# Altium PCB PiMX8MP_r0.3.PcbDoc (part 1 of 10)
Units mm, origin at the board's own origin, x right, y up, seen from the top; angles counter-clockwise.
Board outline 55 x 40 mm, 10 copper layers (Top Layer, Layer 1, Layer 2, Layer 3, Layer 4, Layer 5, Layer 6, Layer 7, Layer 8, Bottom Layer), stack 1.472 mm thick; 545 components, 477 nets, 2606 pads, 2278 vias.
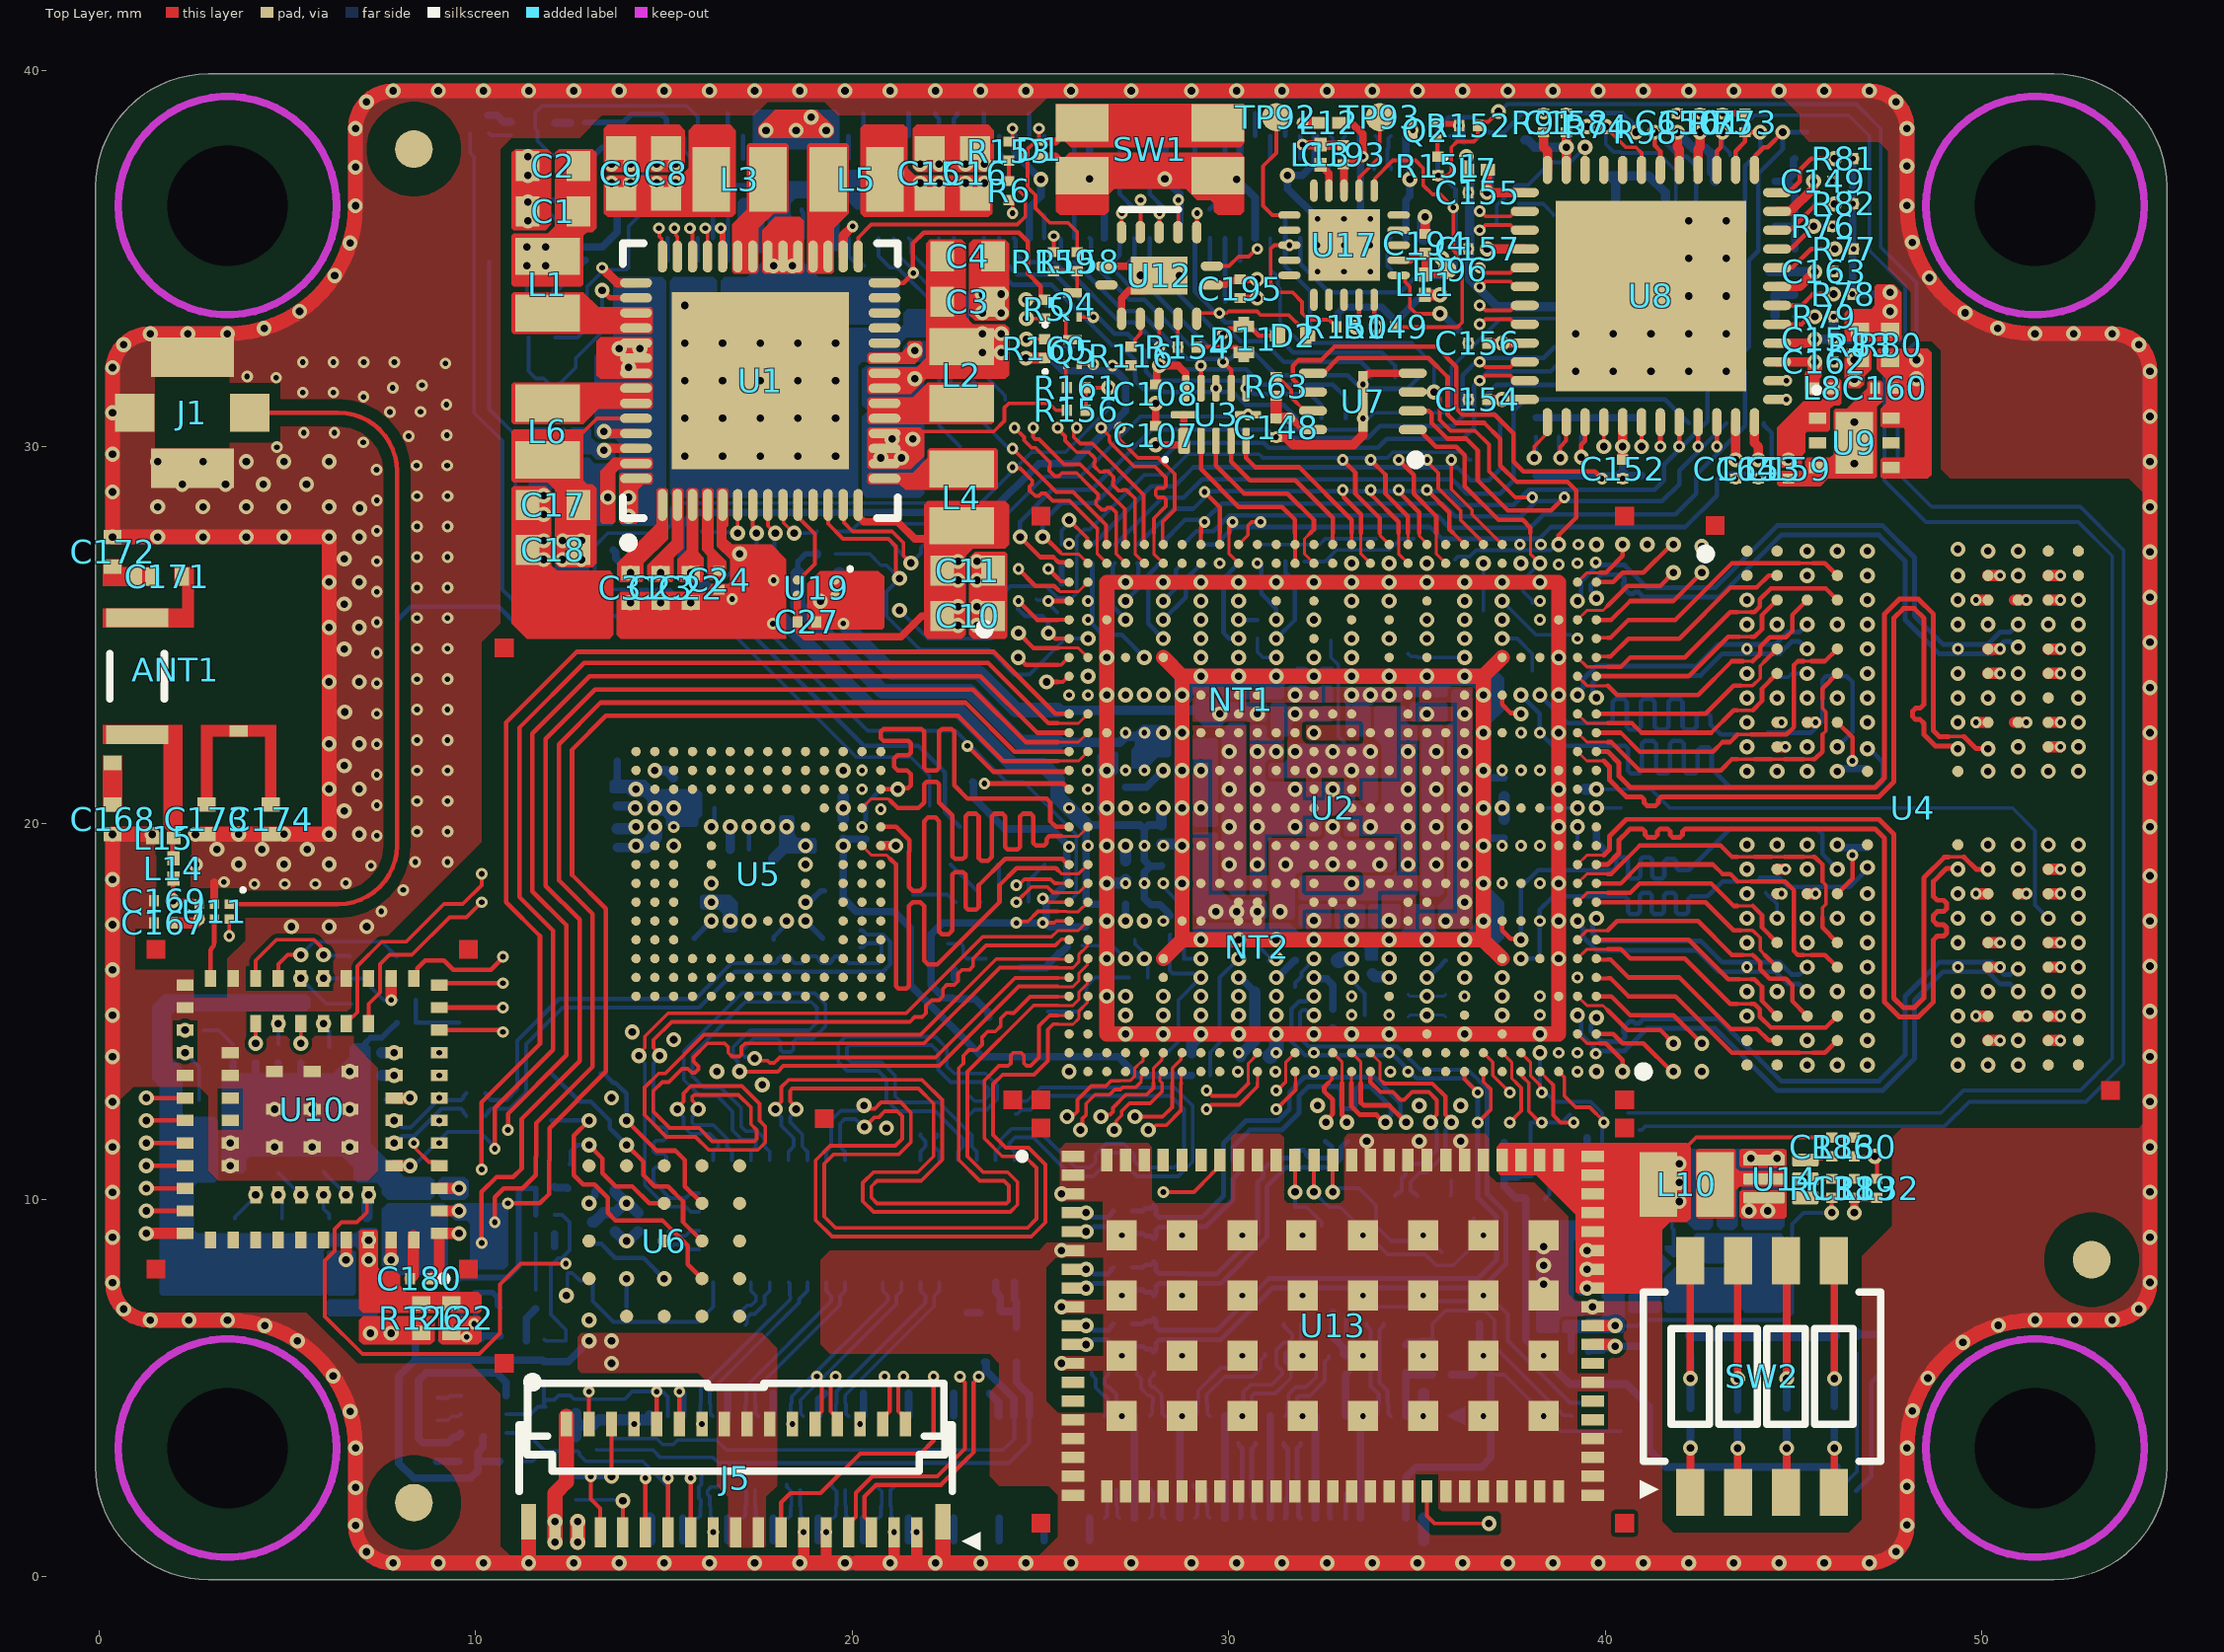
[diagram p0: Top Layer view]
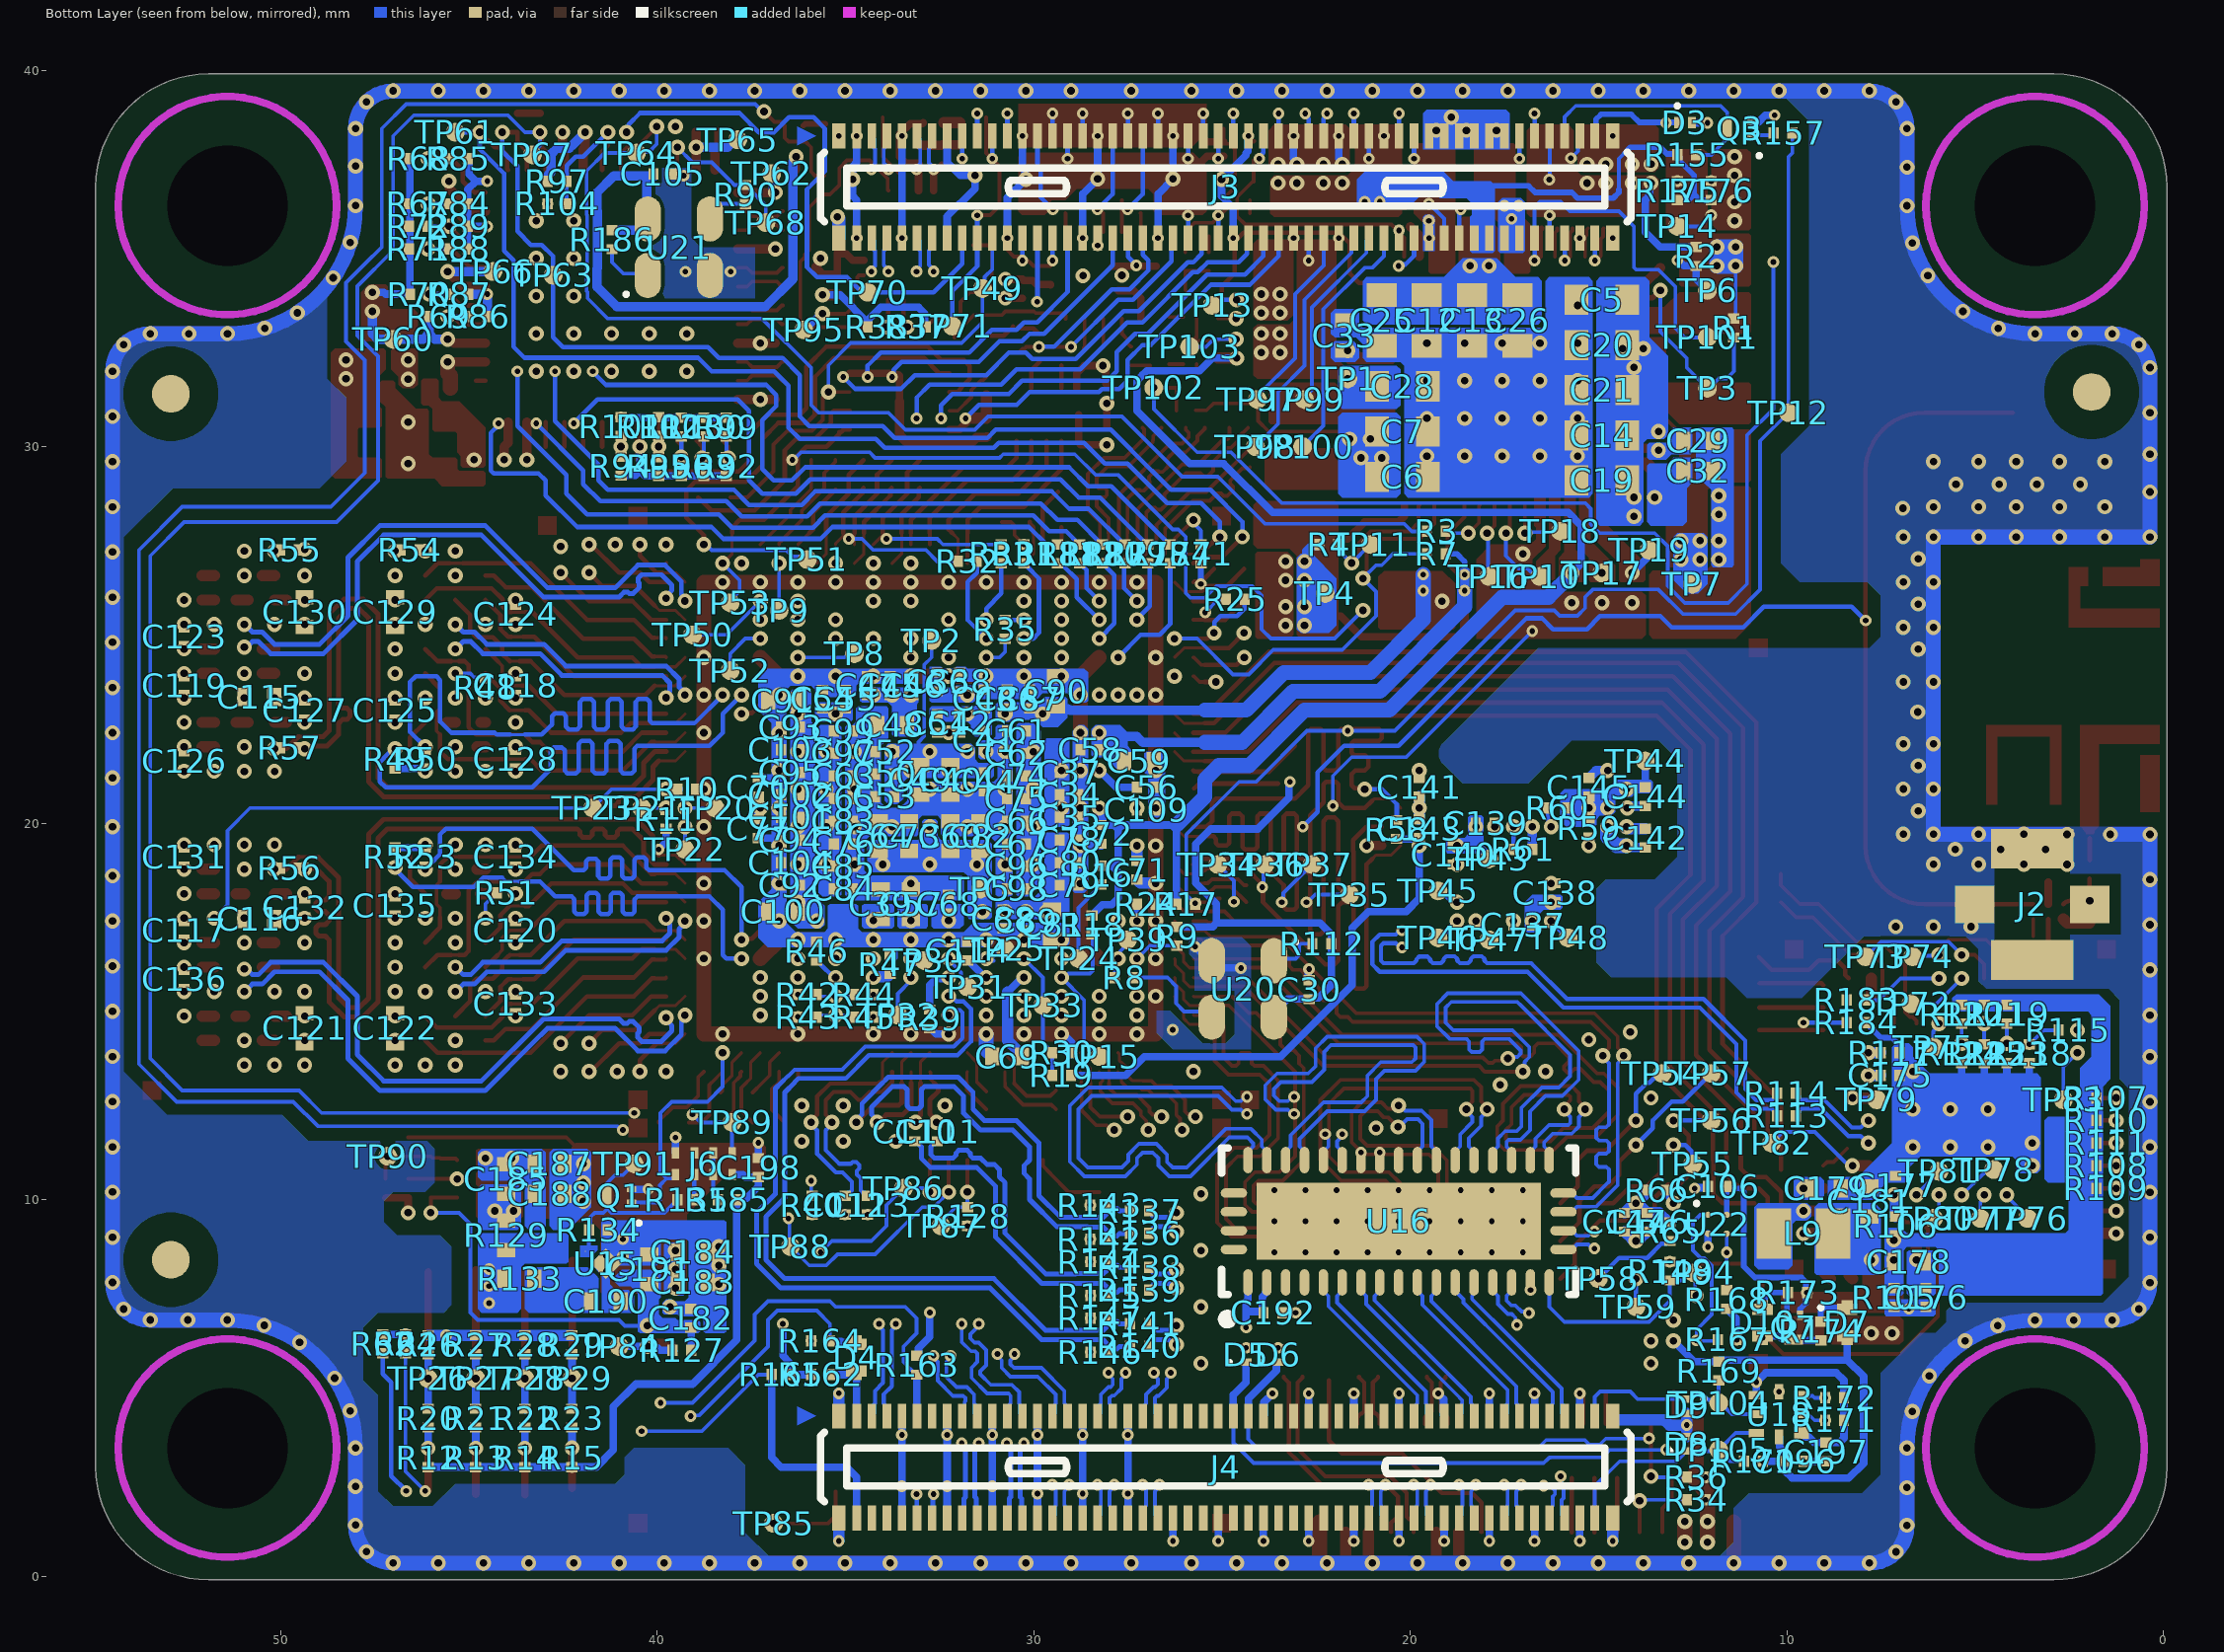
[diagram p1: Bottom Layer view, seen from below]
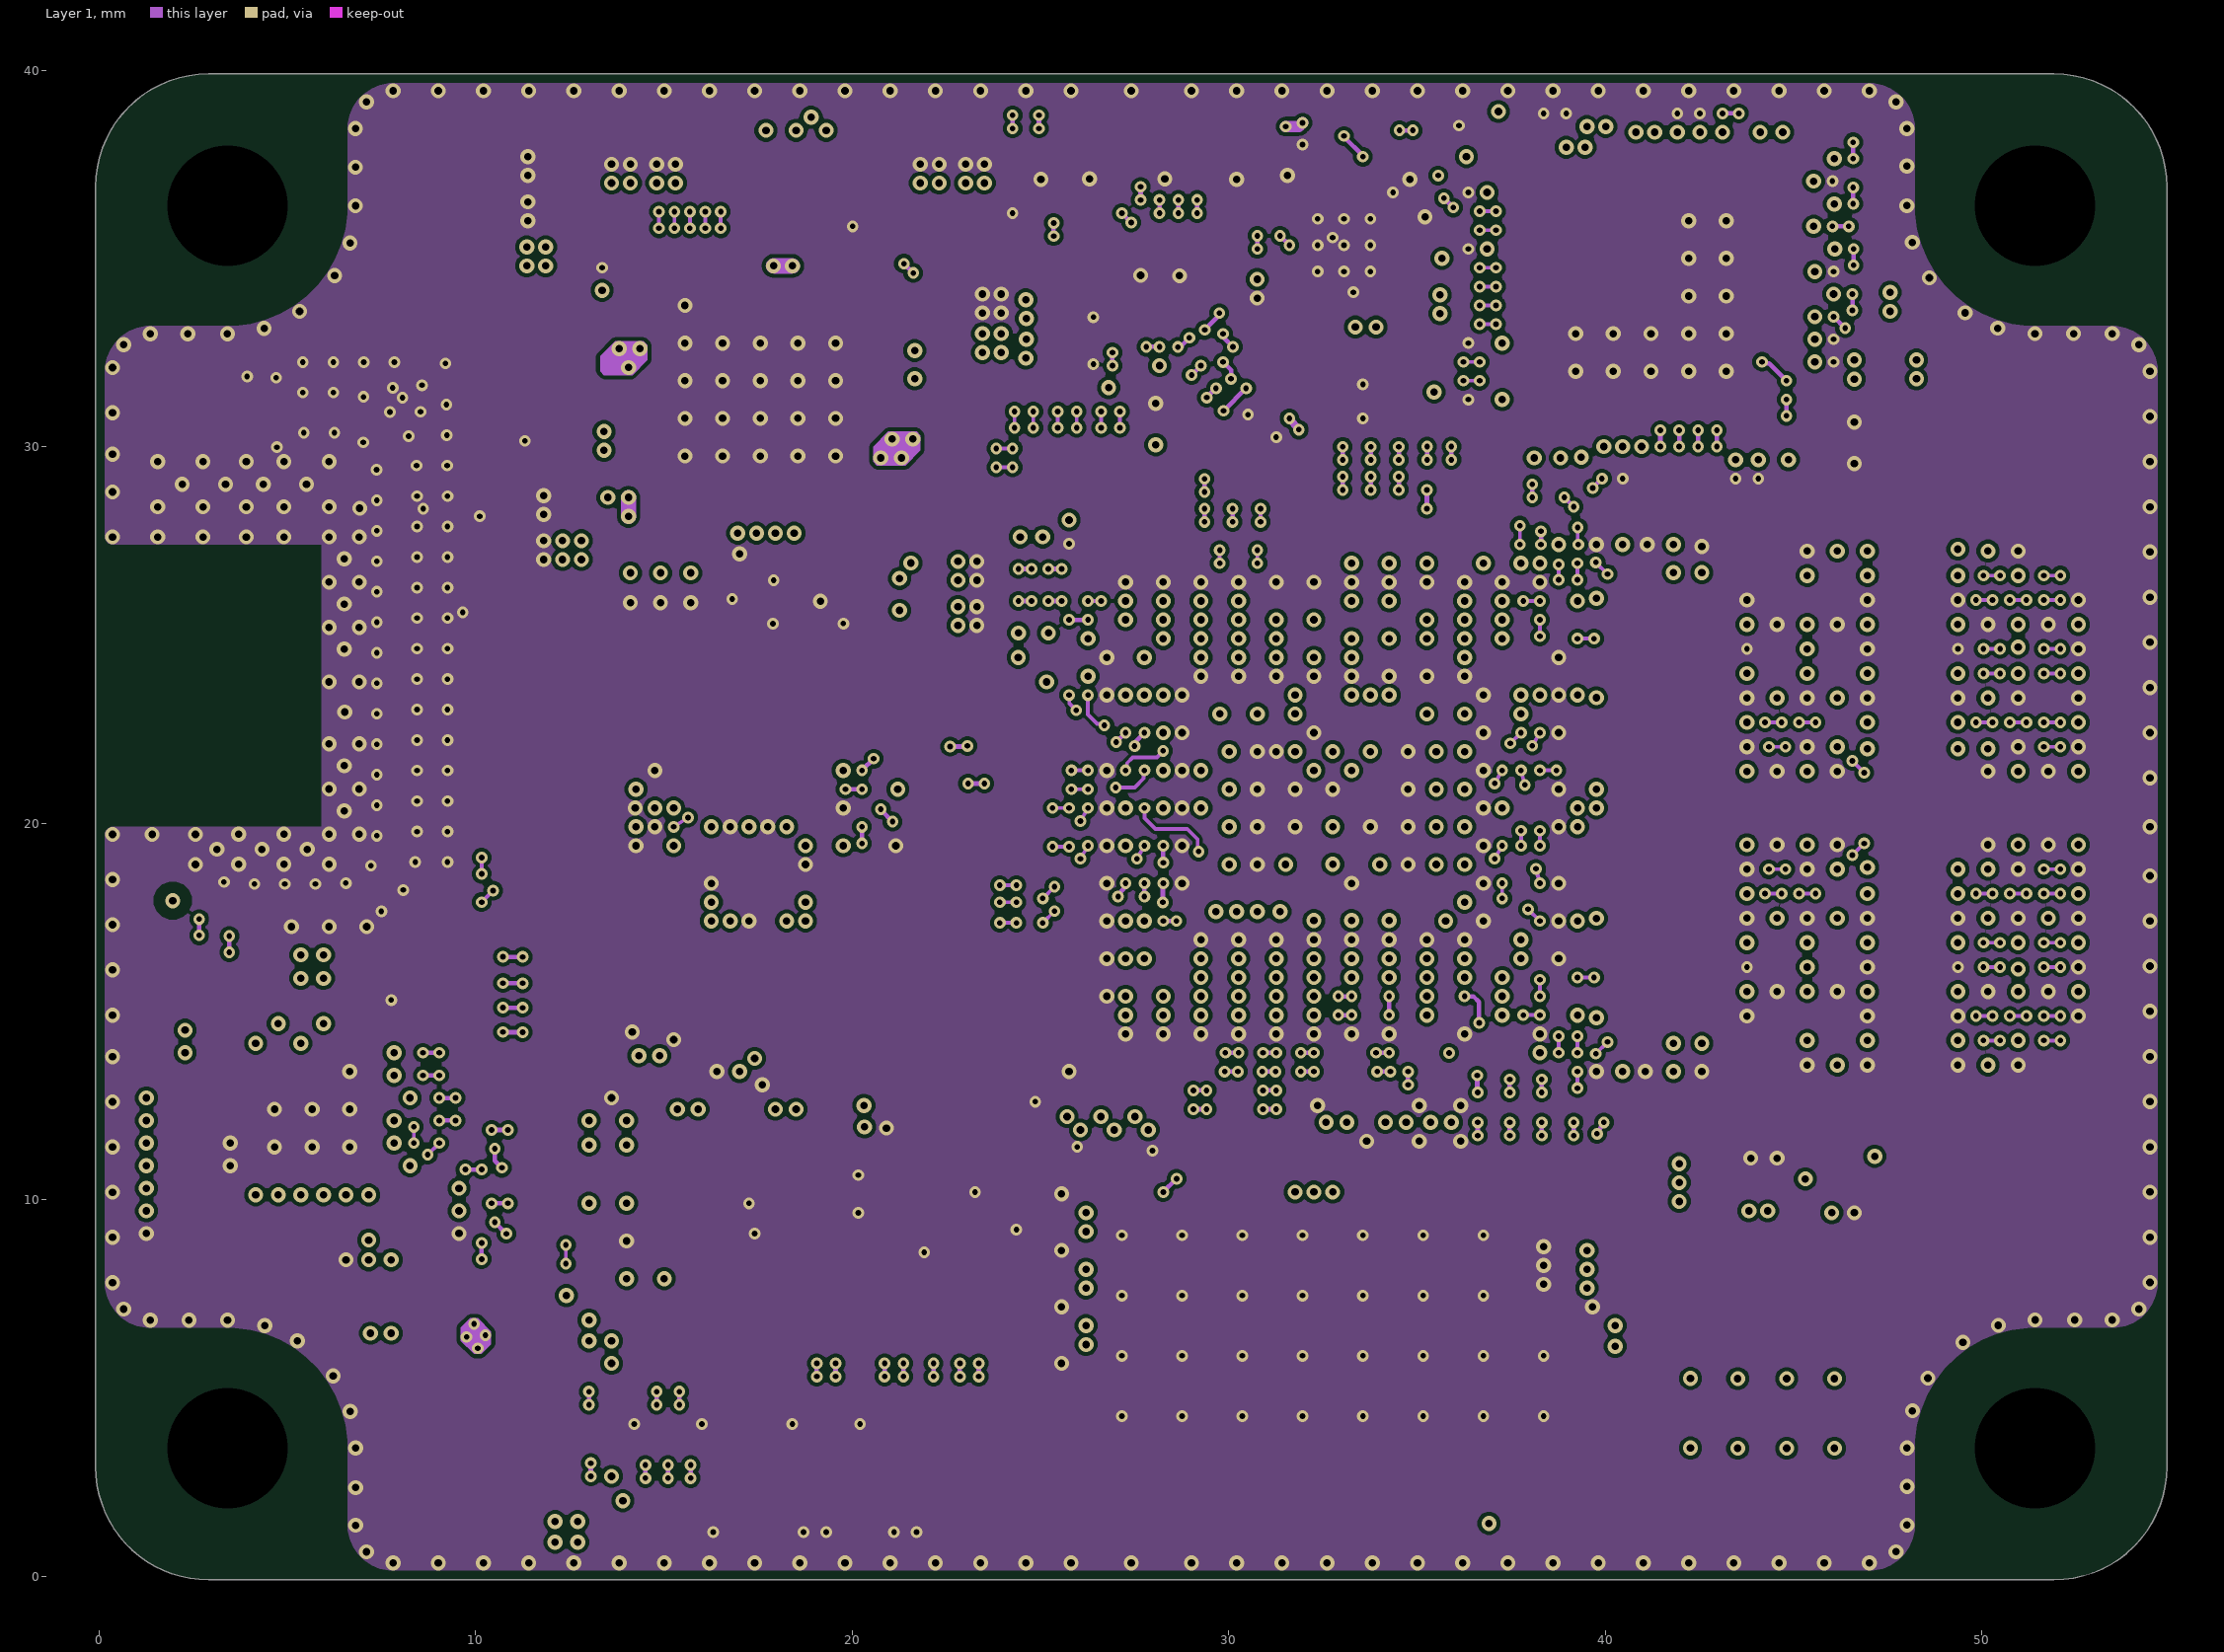
[diagram p2: Layer 1]
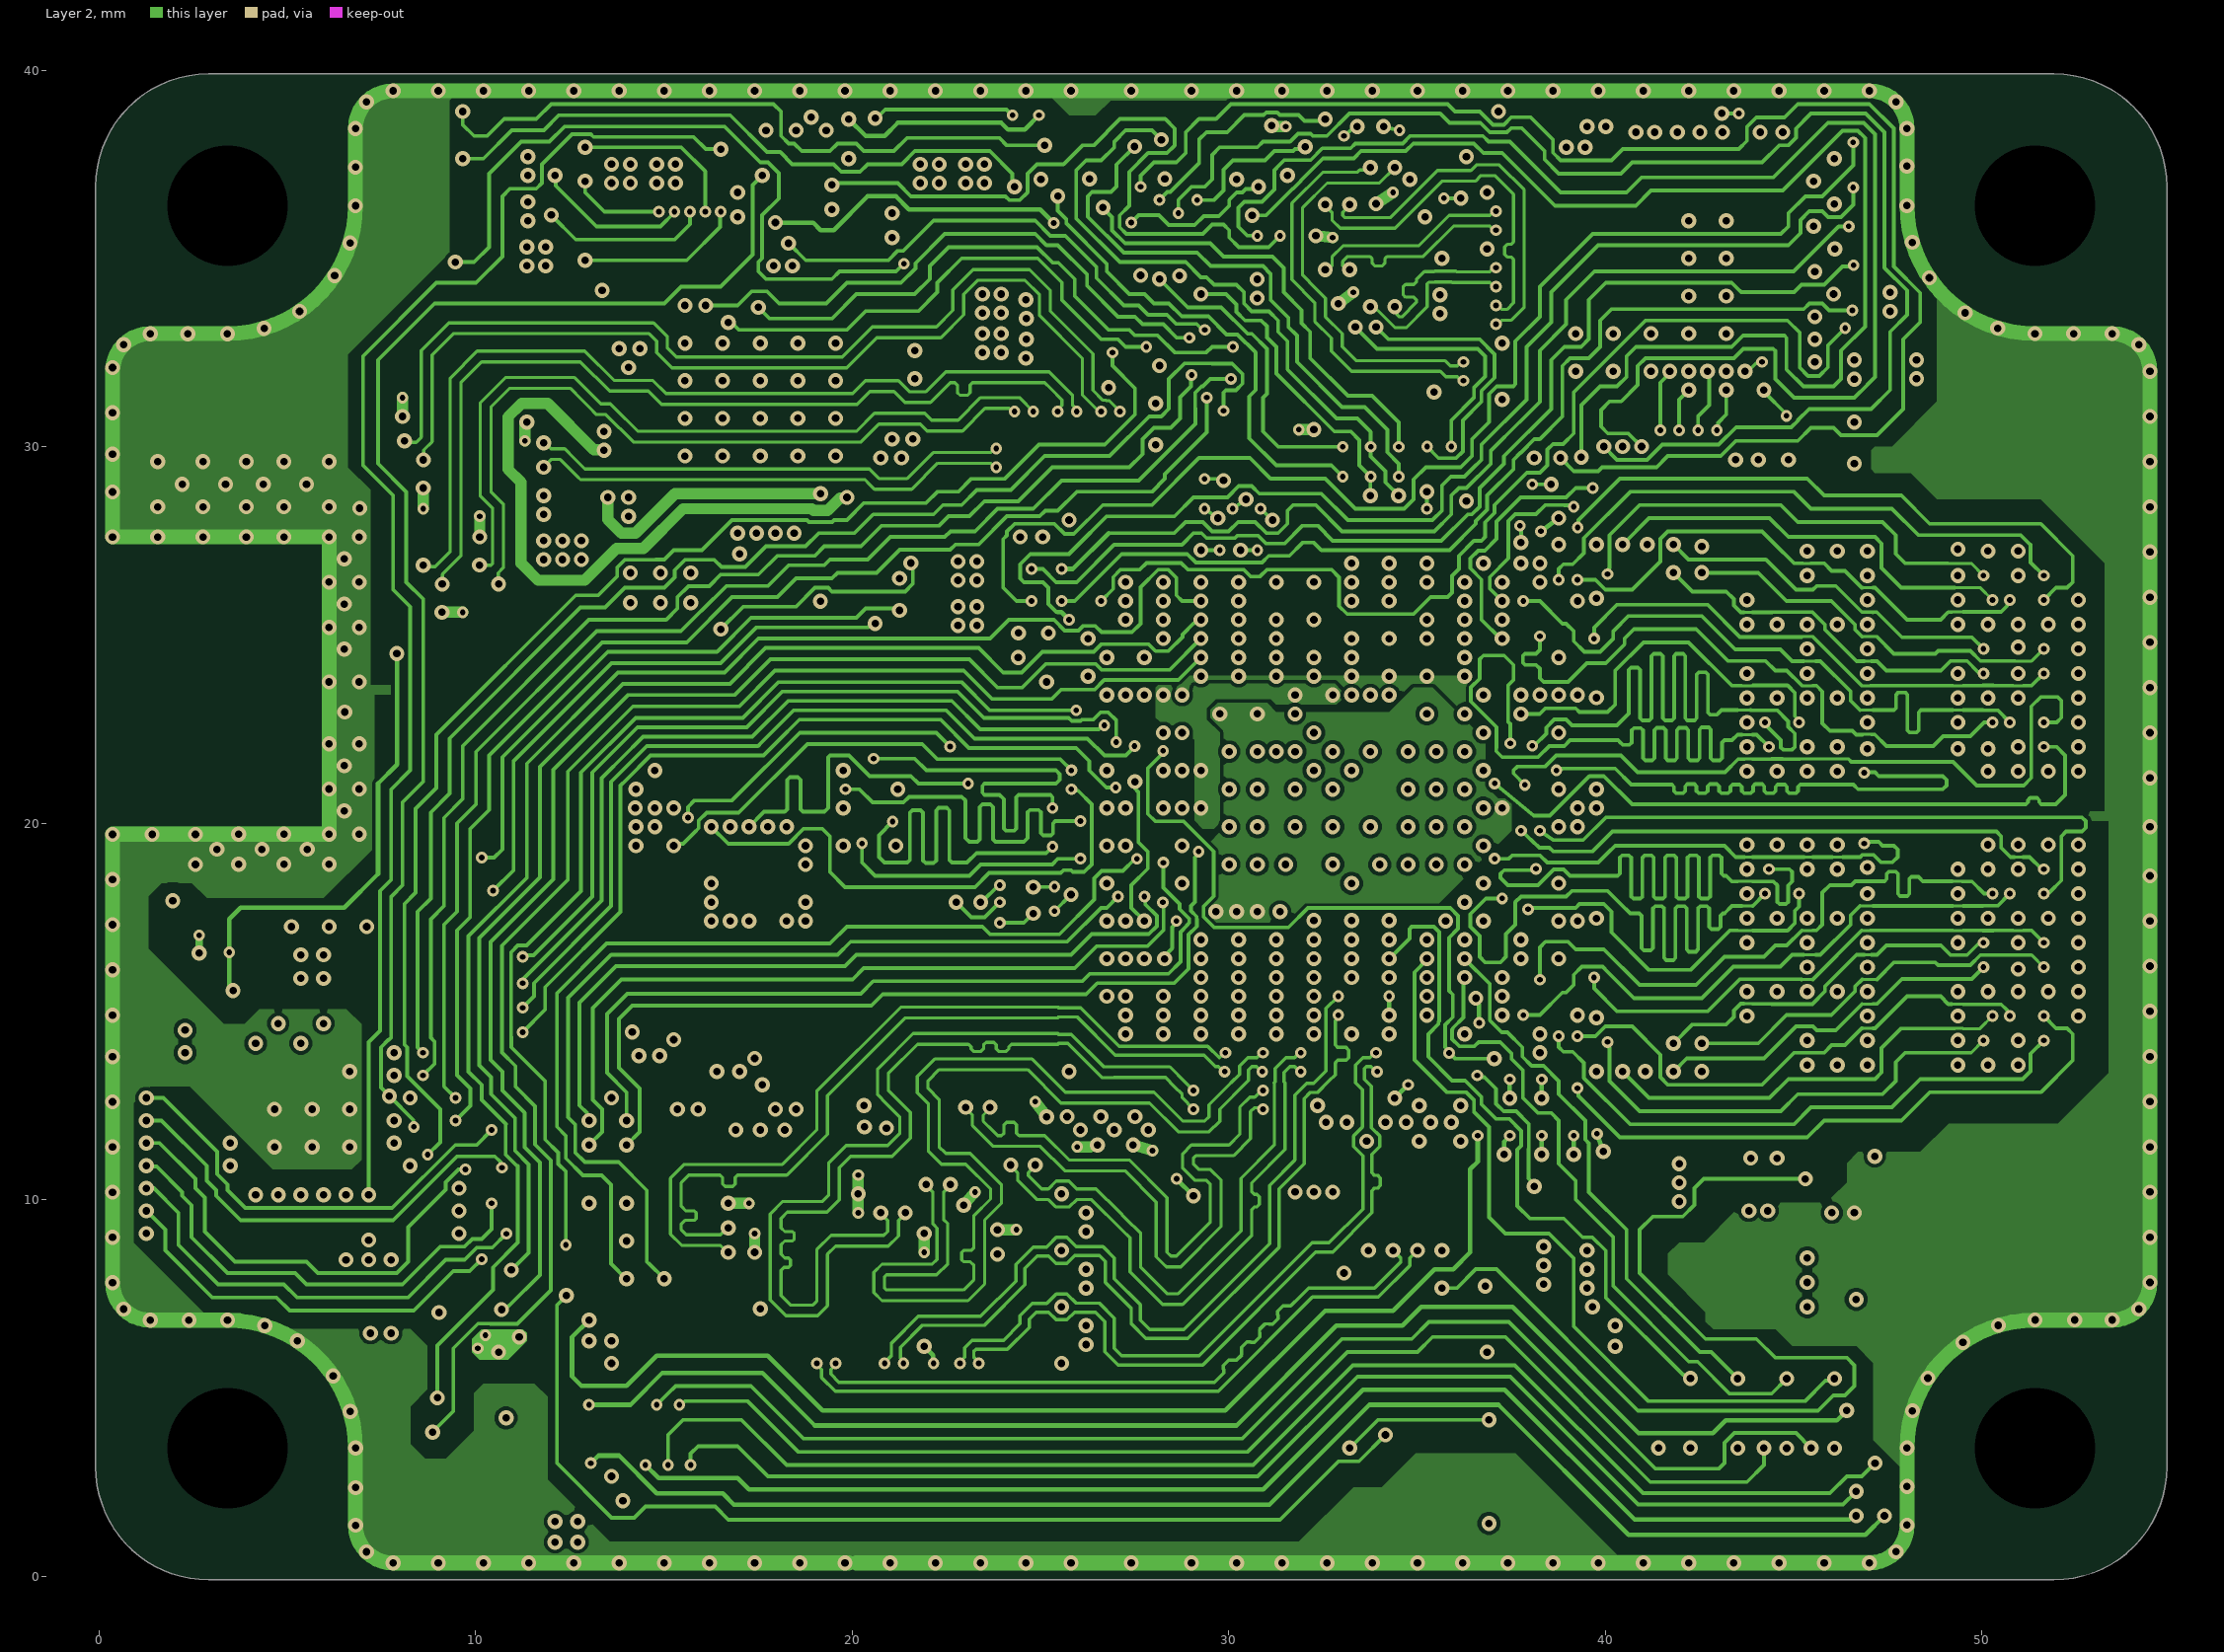
[diagram p3: Layer 2]
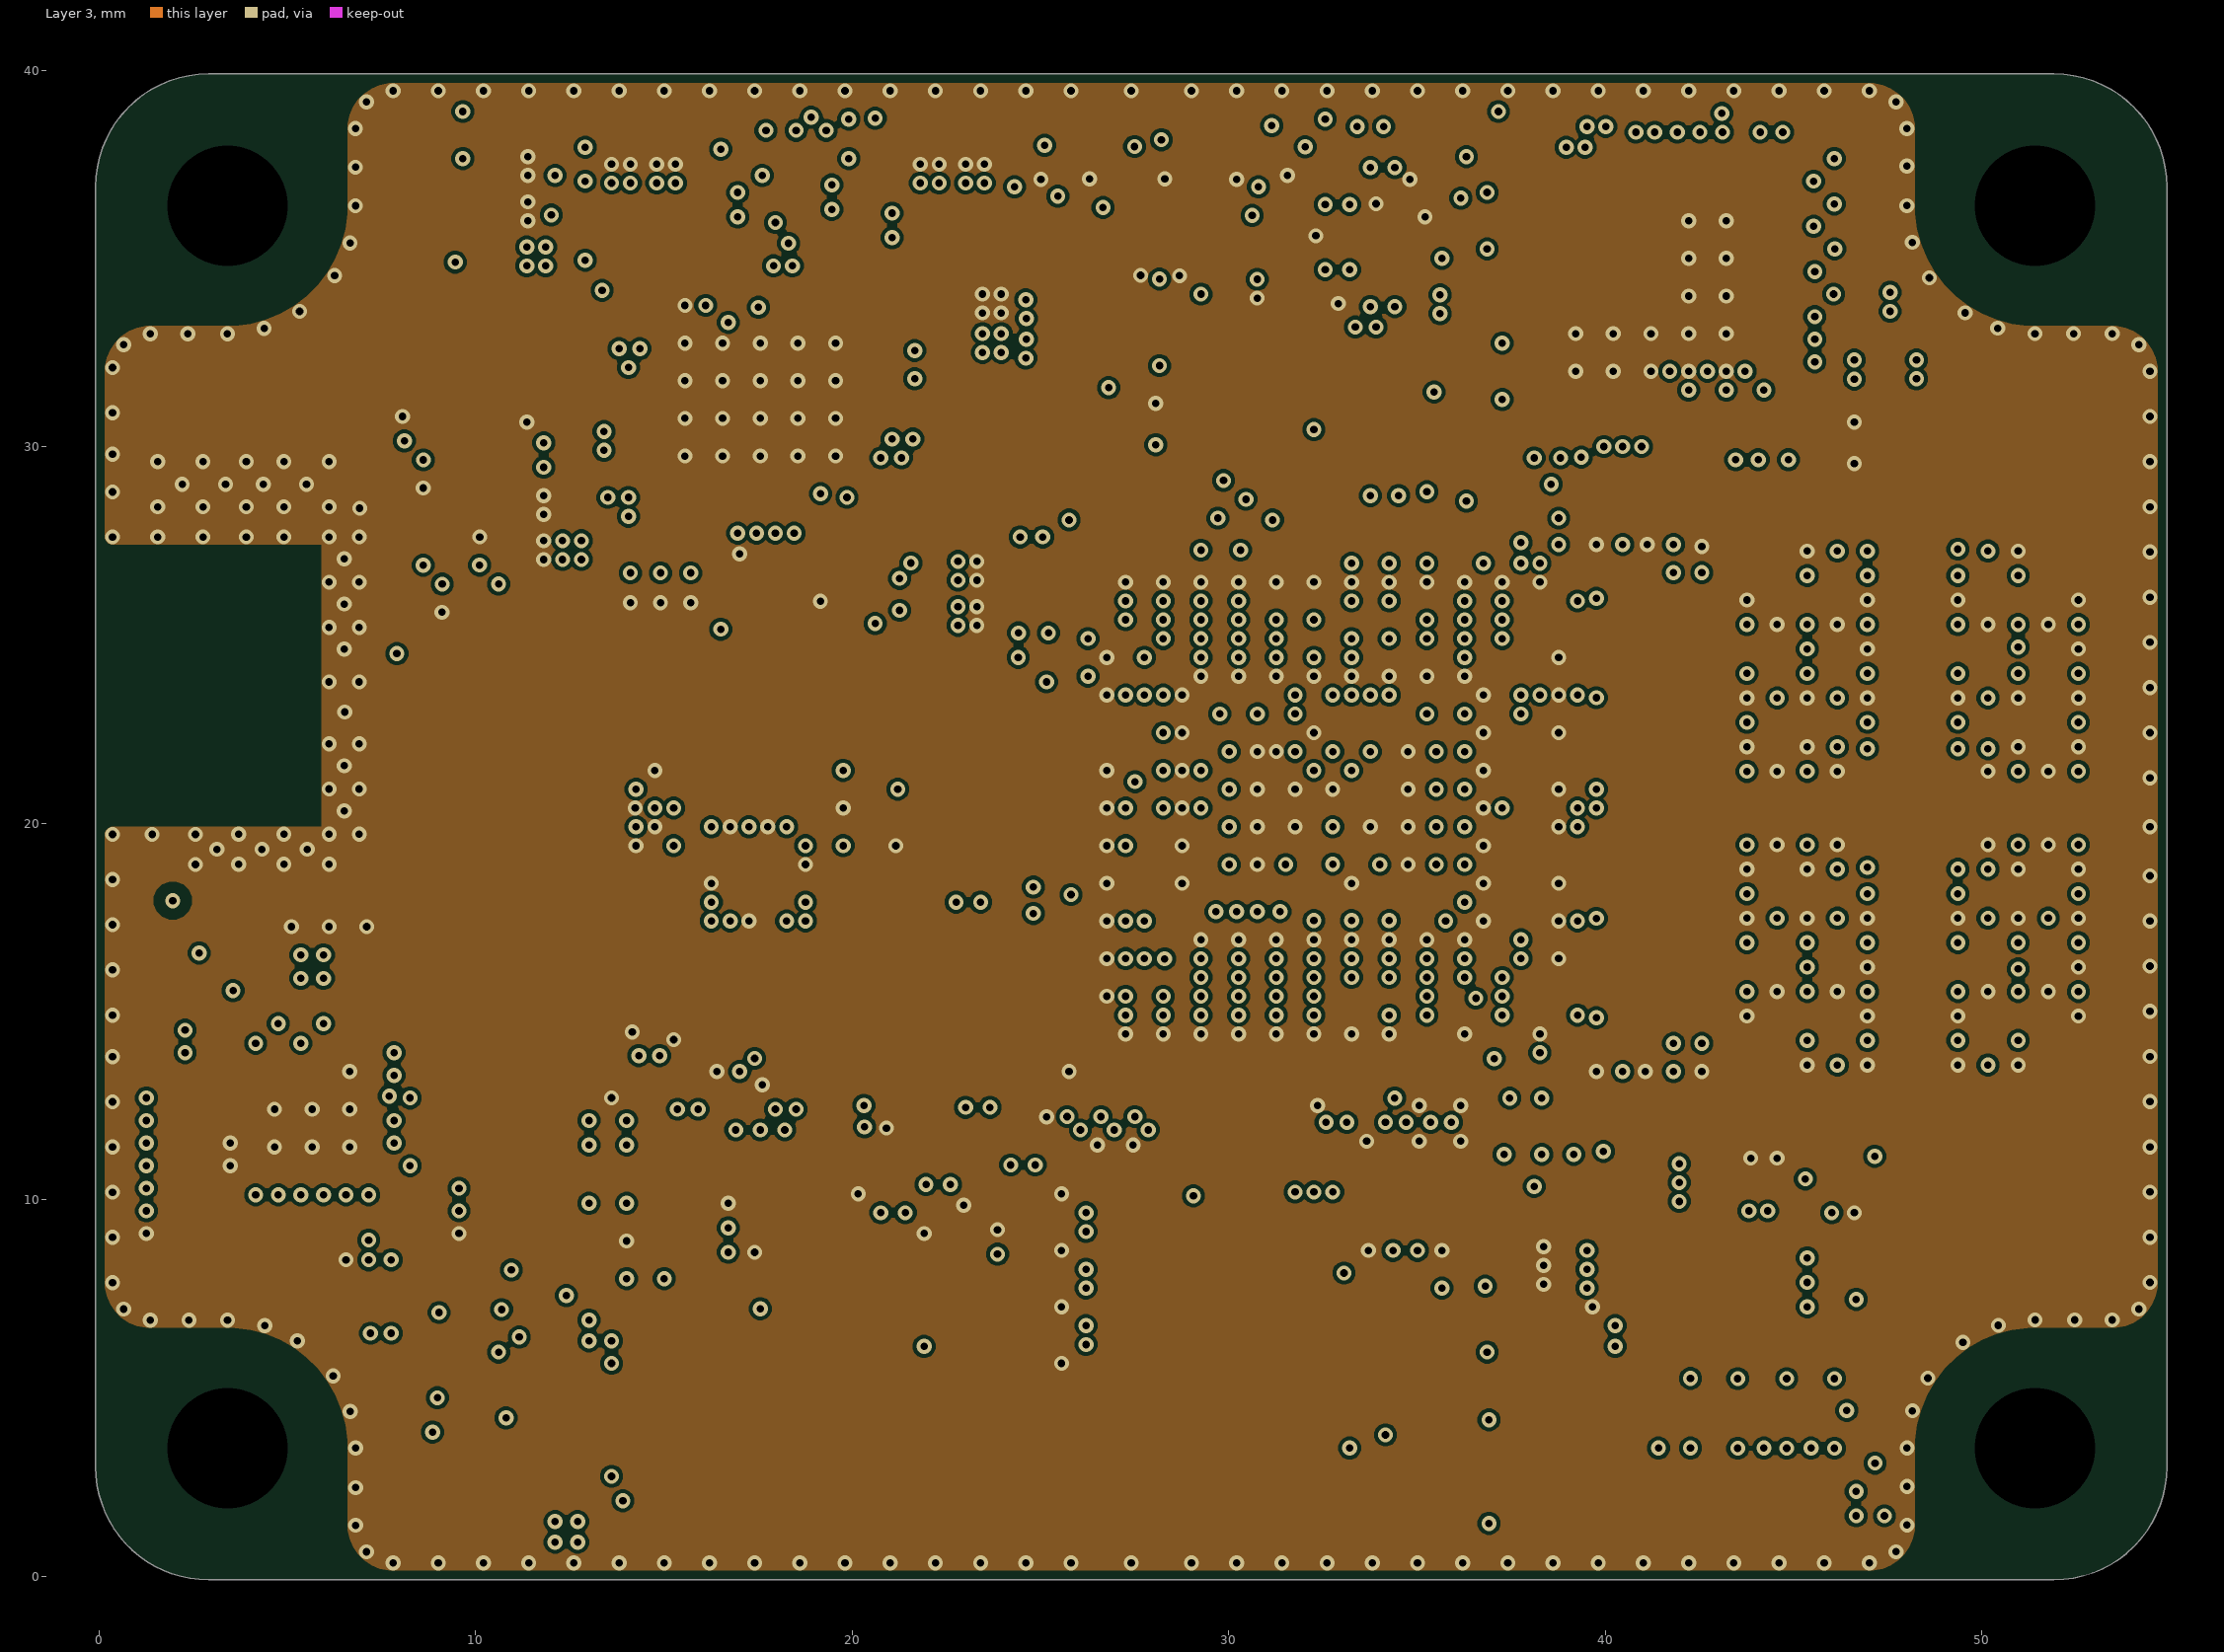
[diagram p4: Layer 3]
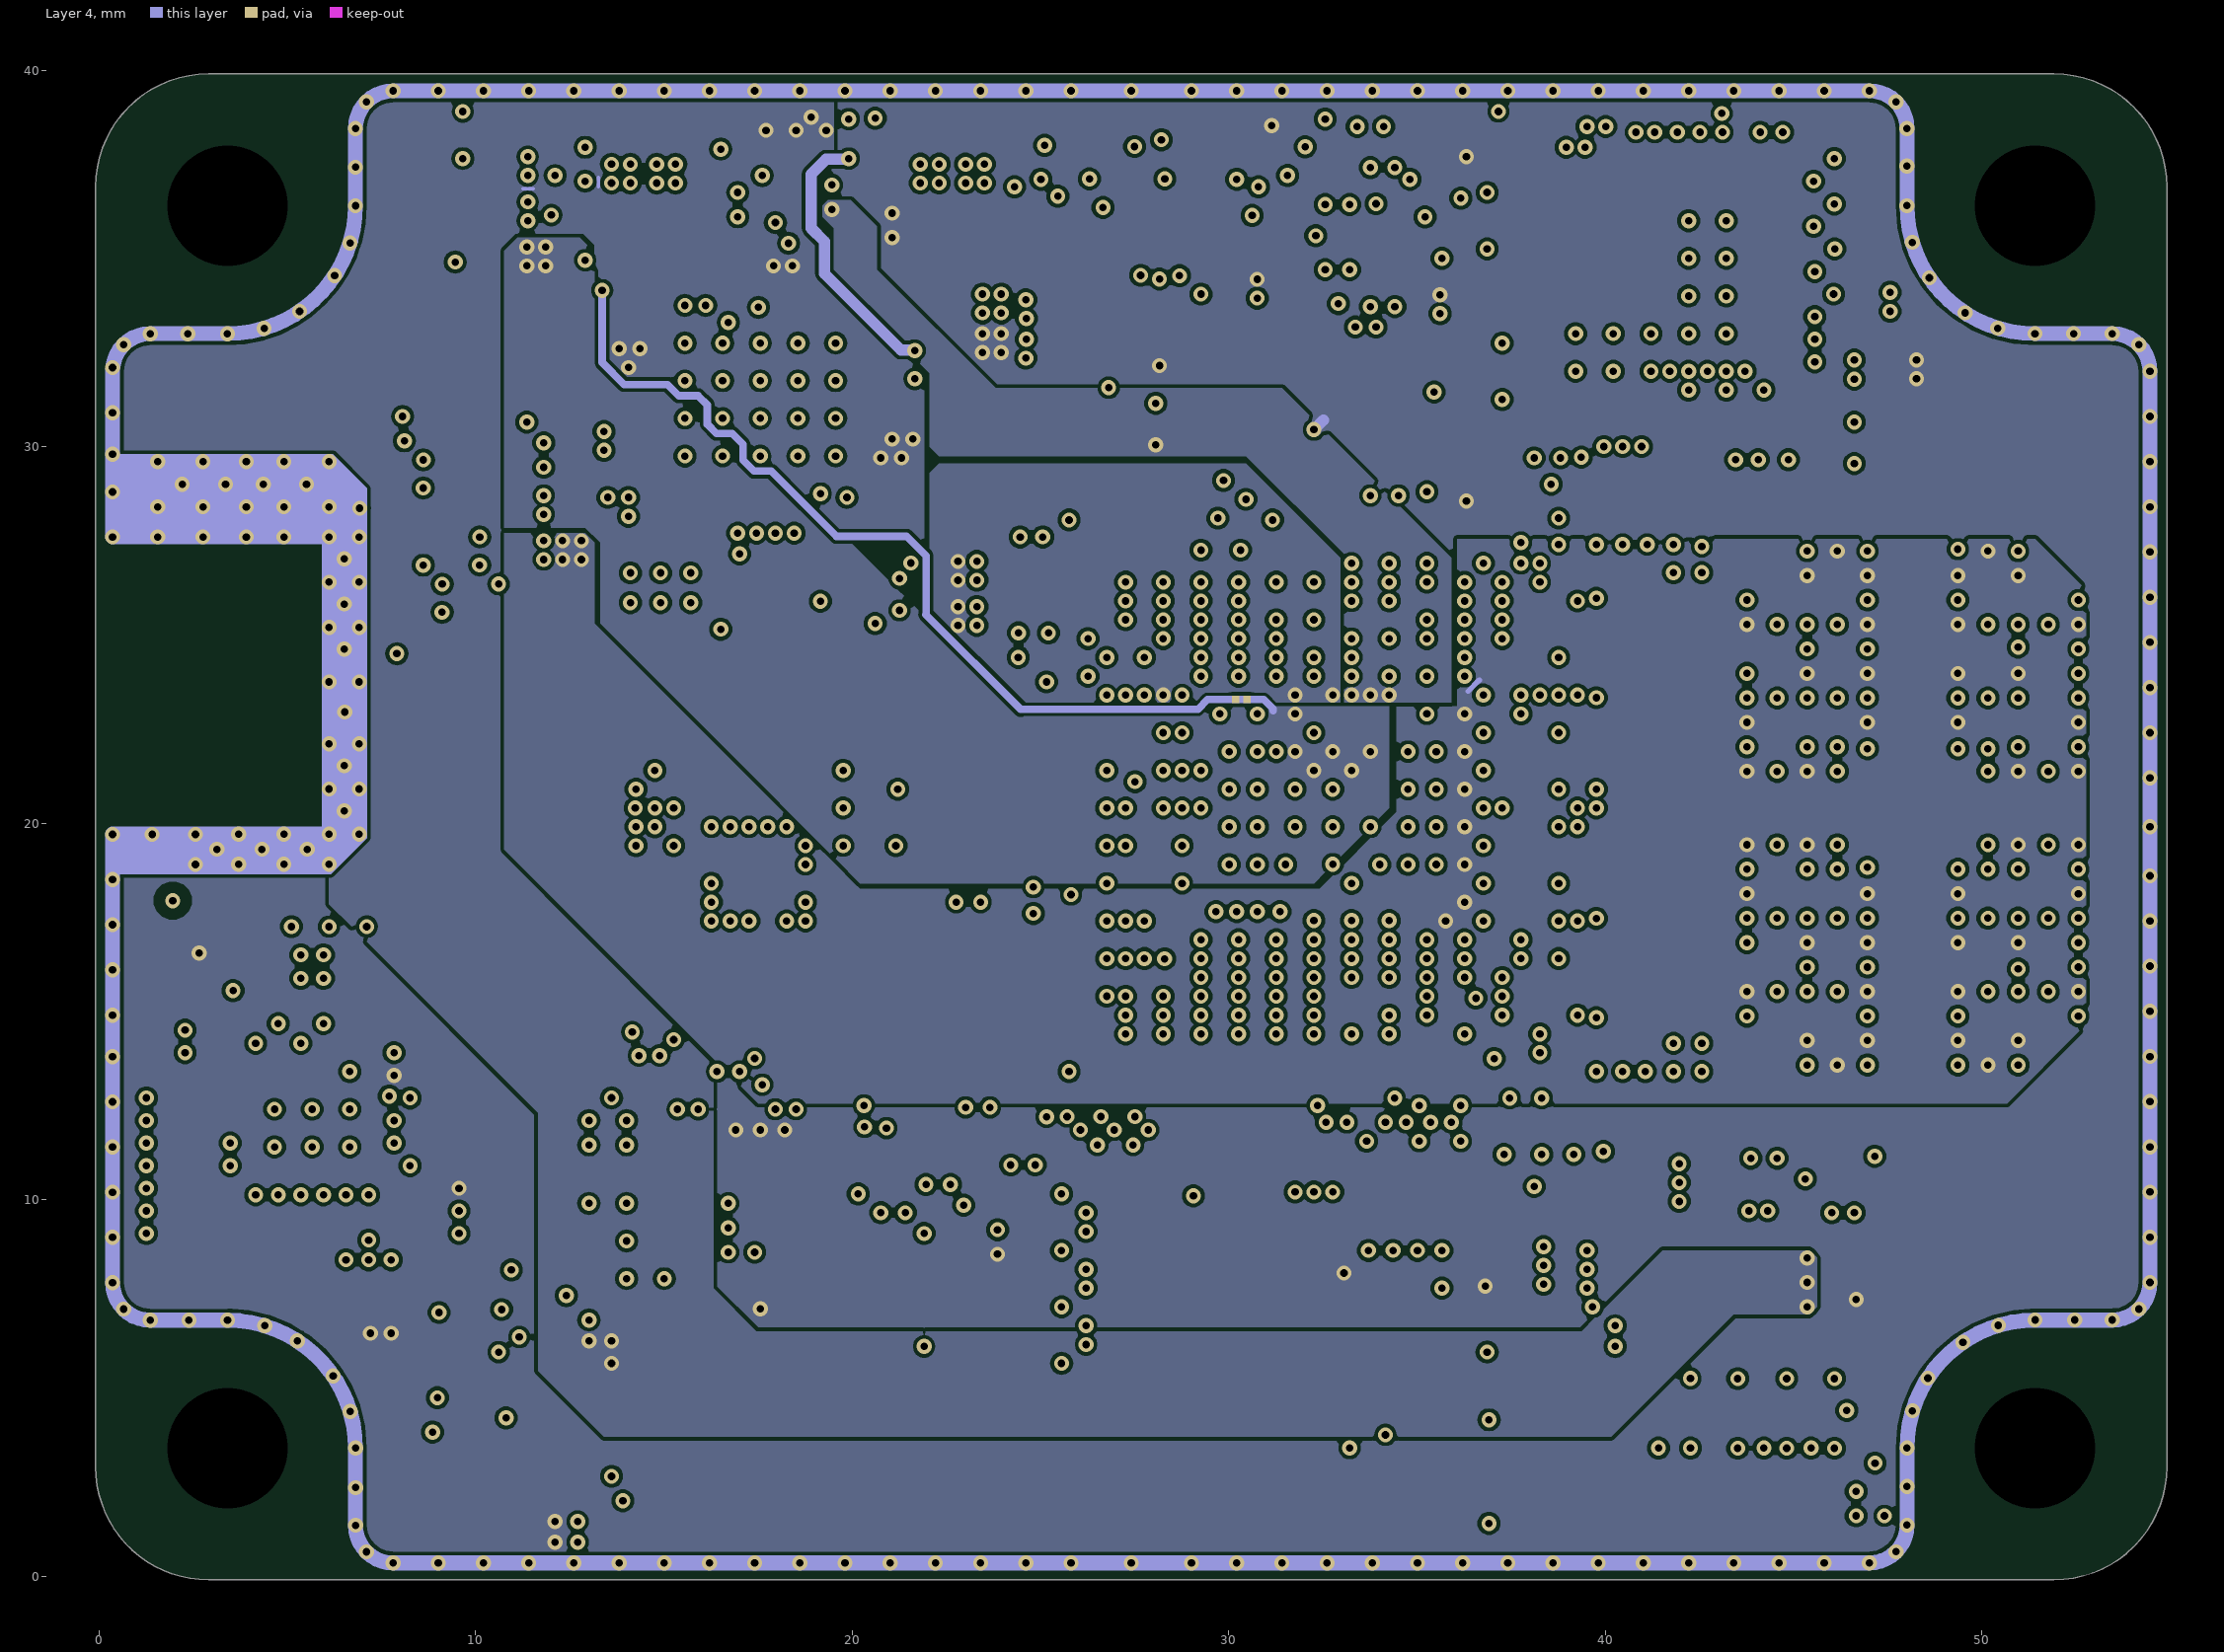
[diagram p5: Layer 4]
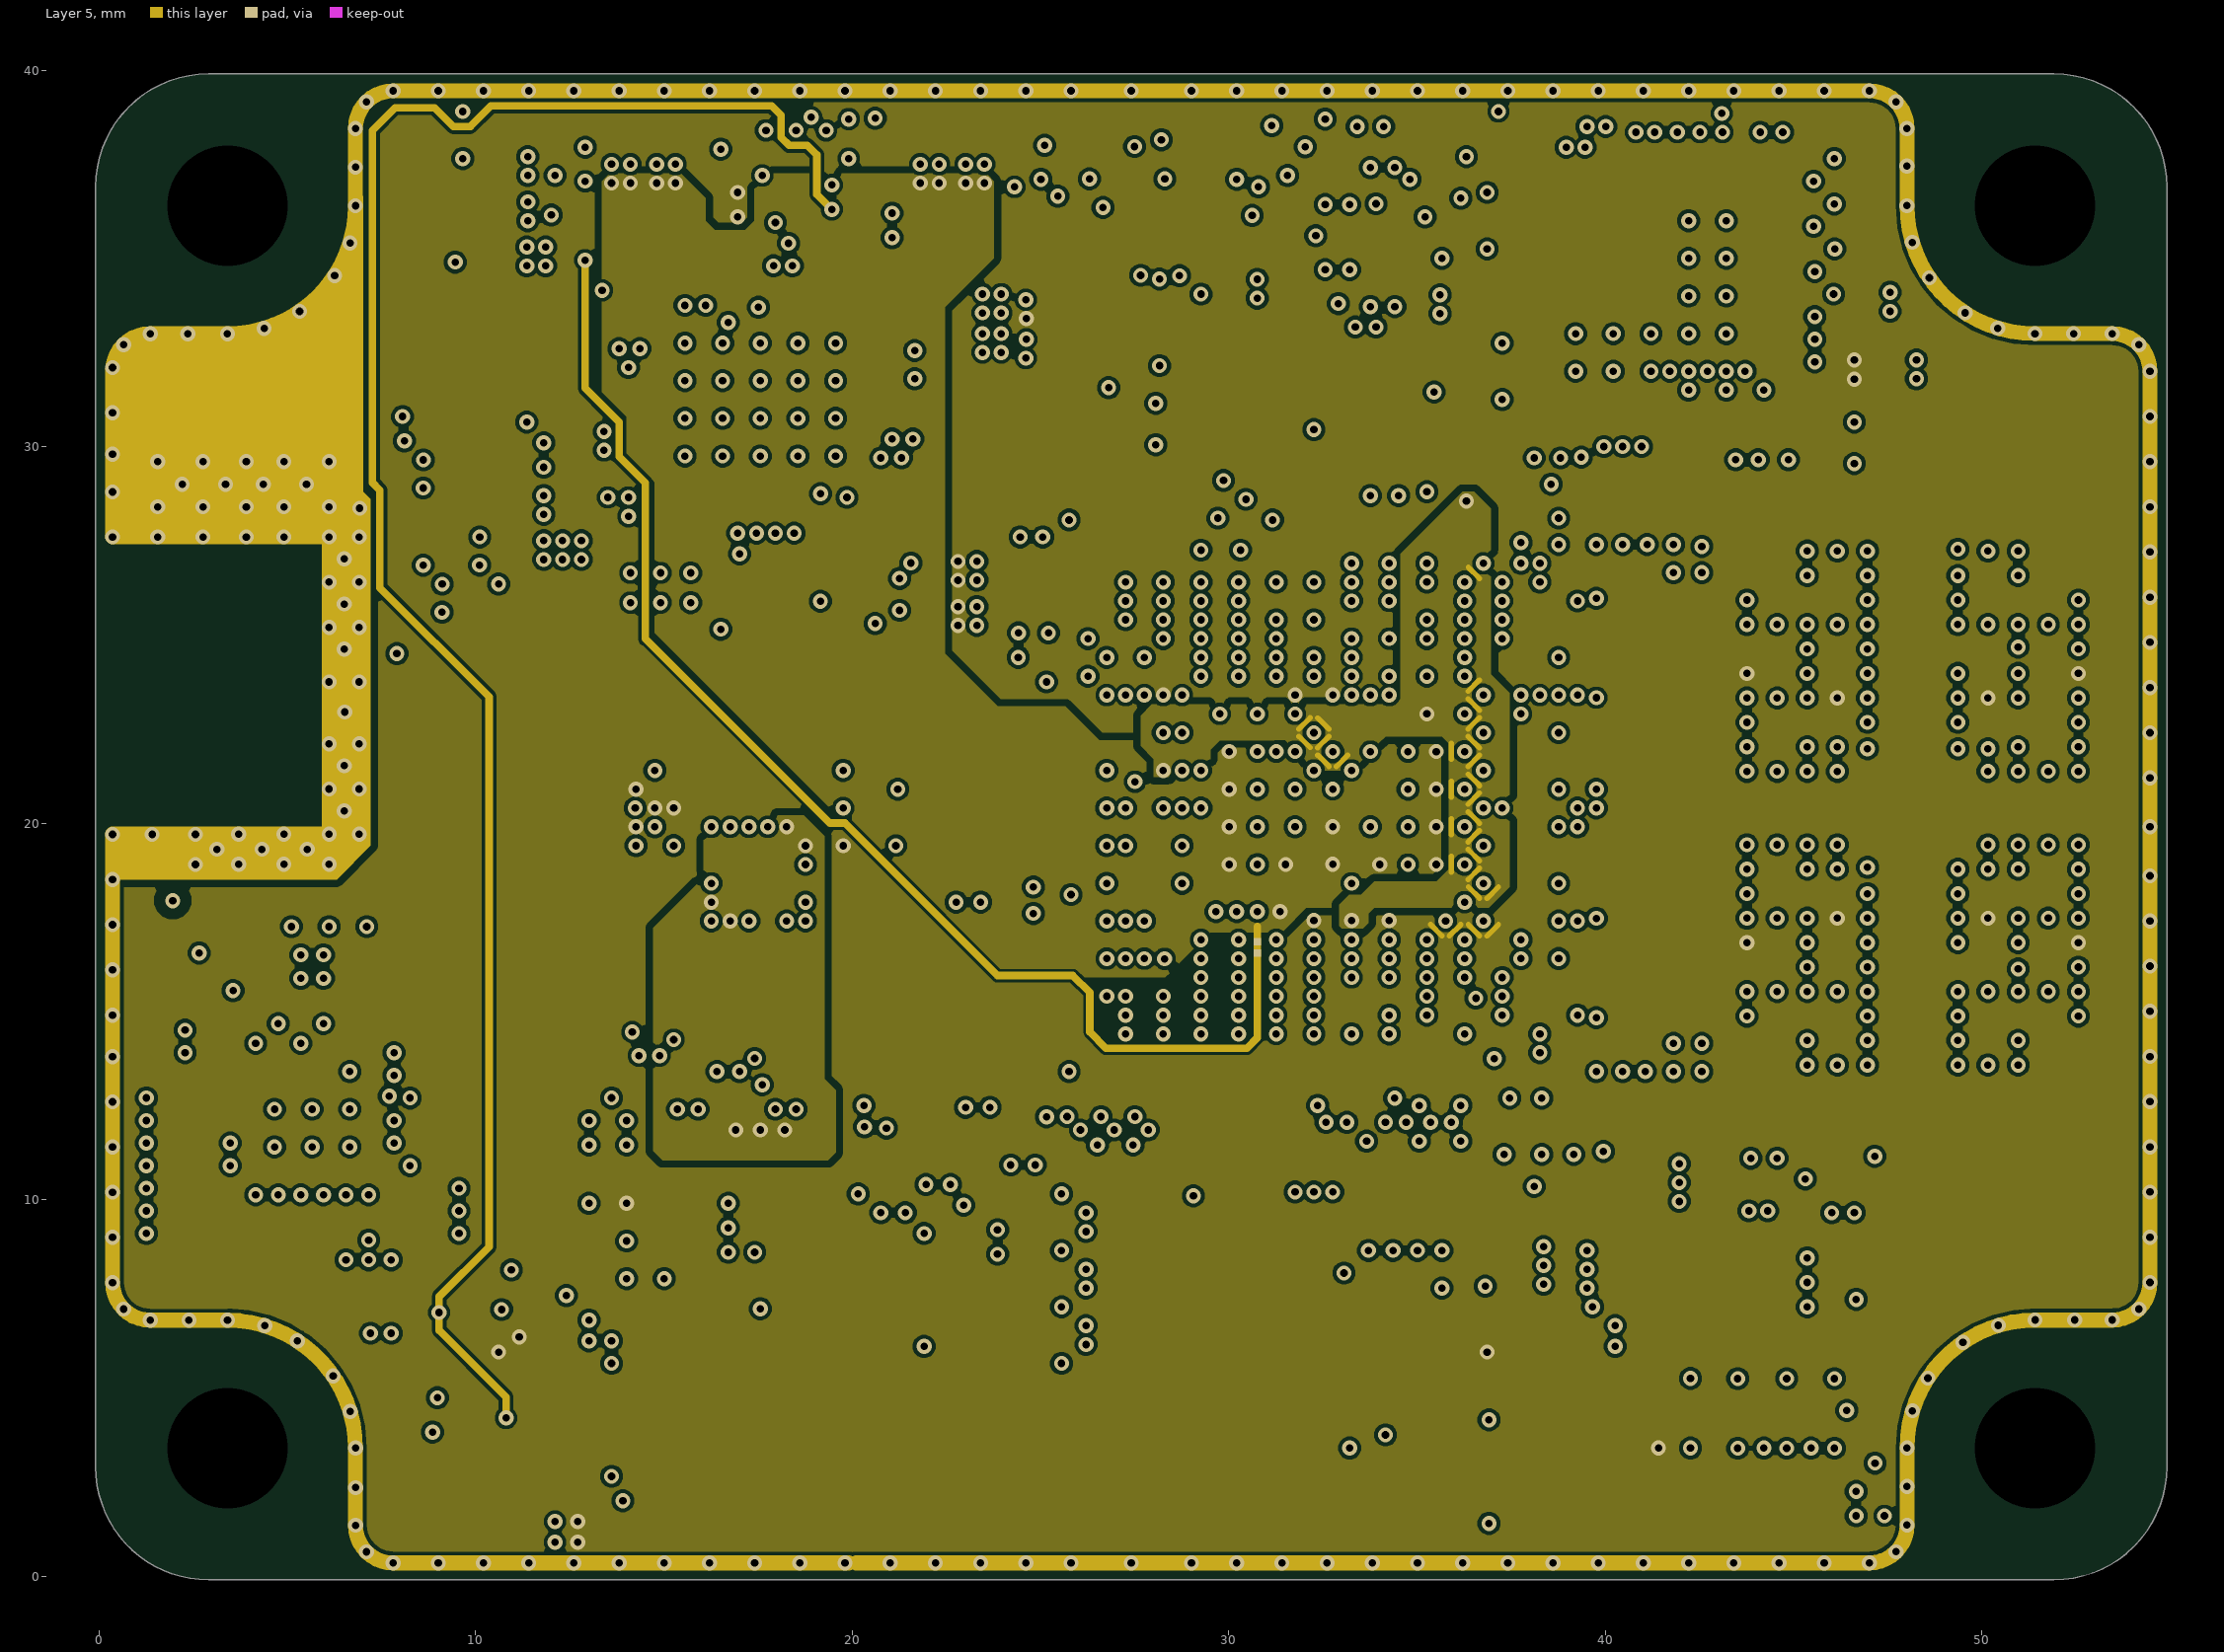
[diagram p6: Layer 5]
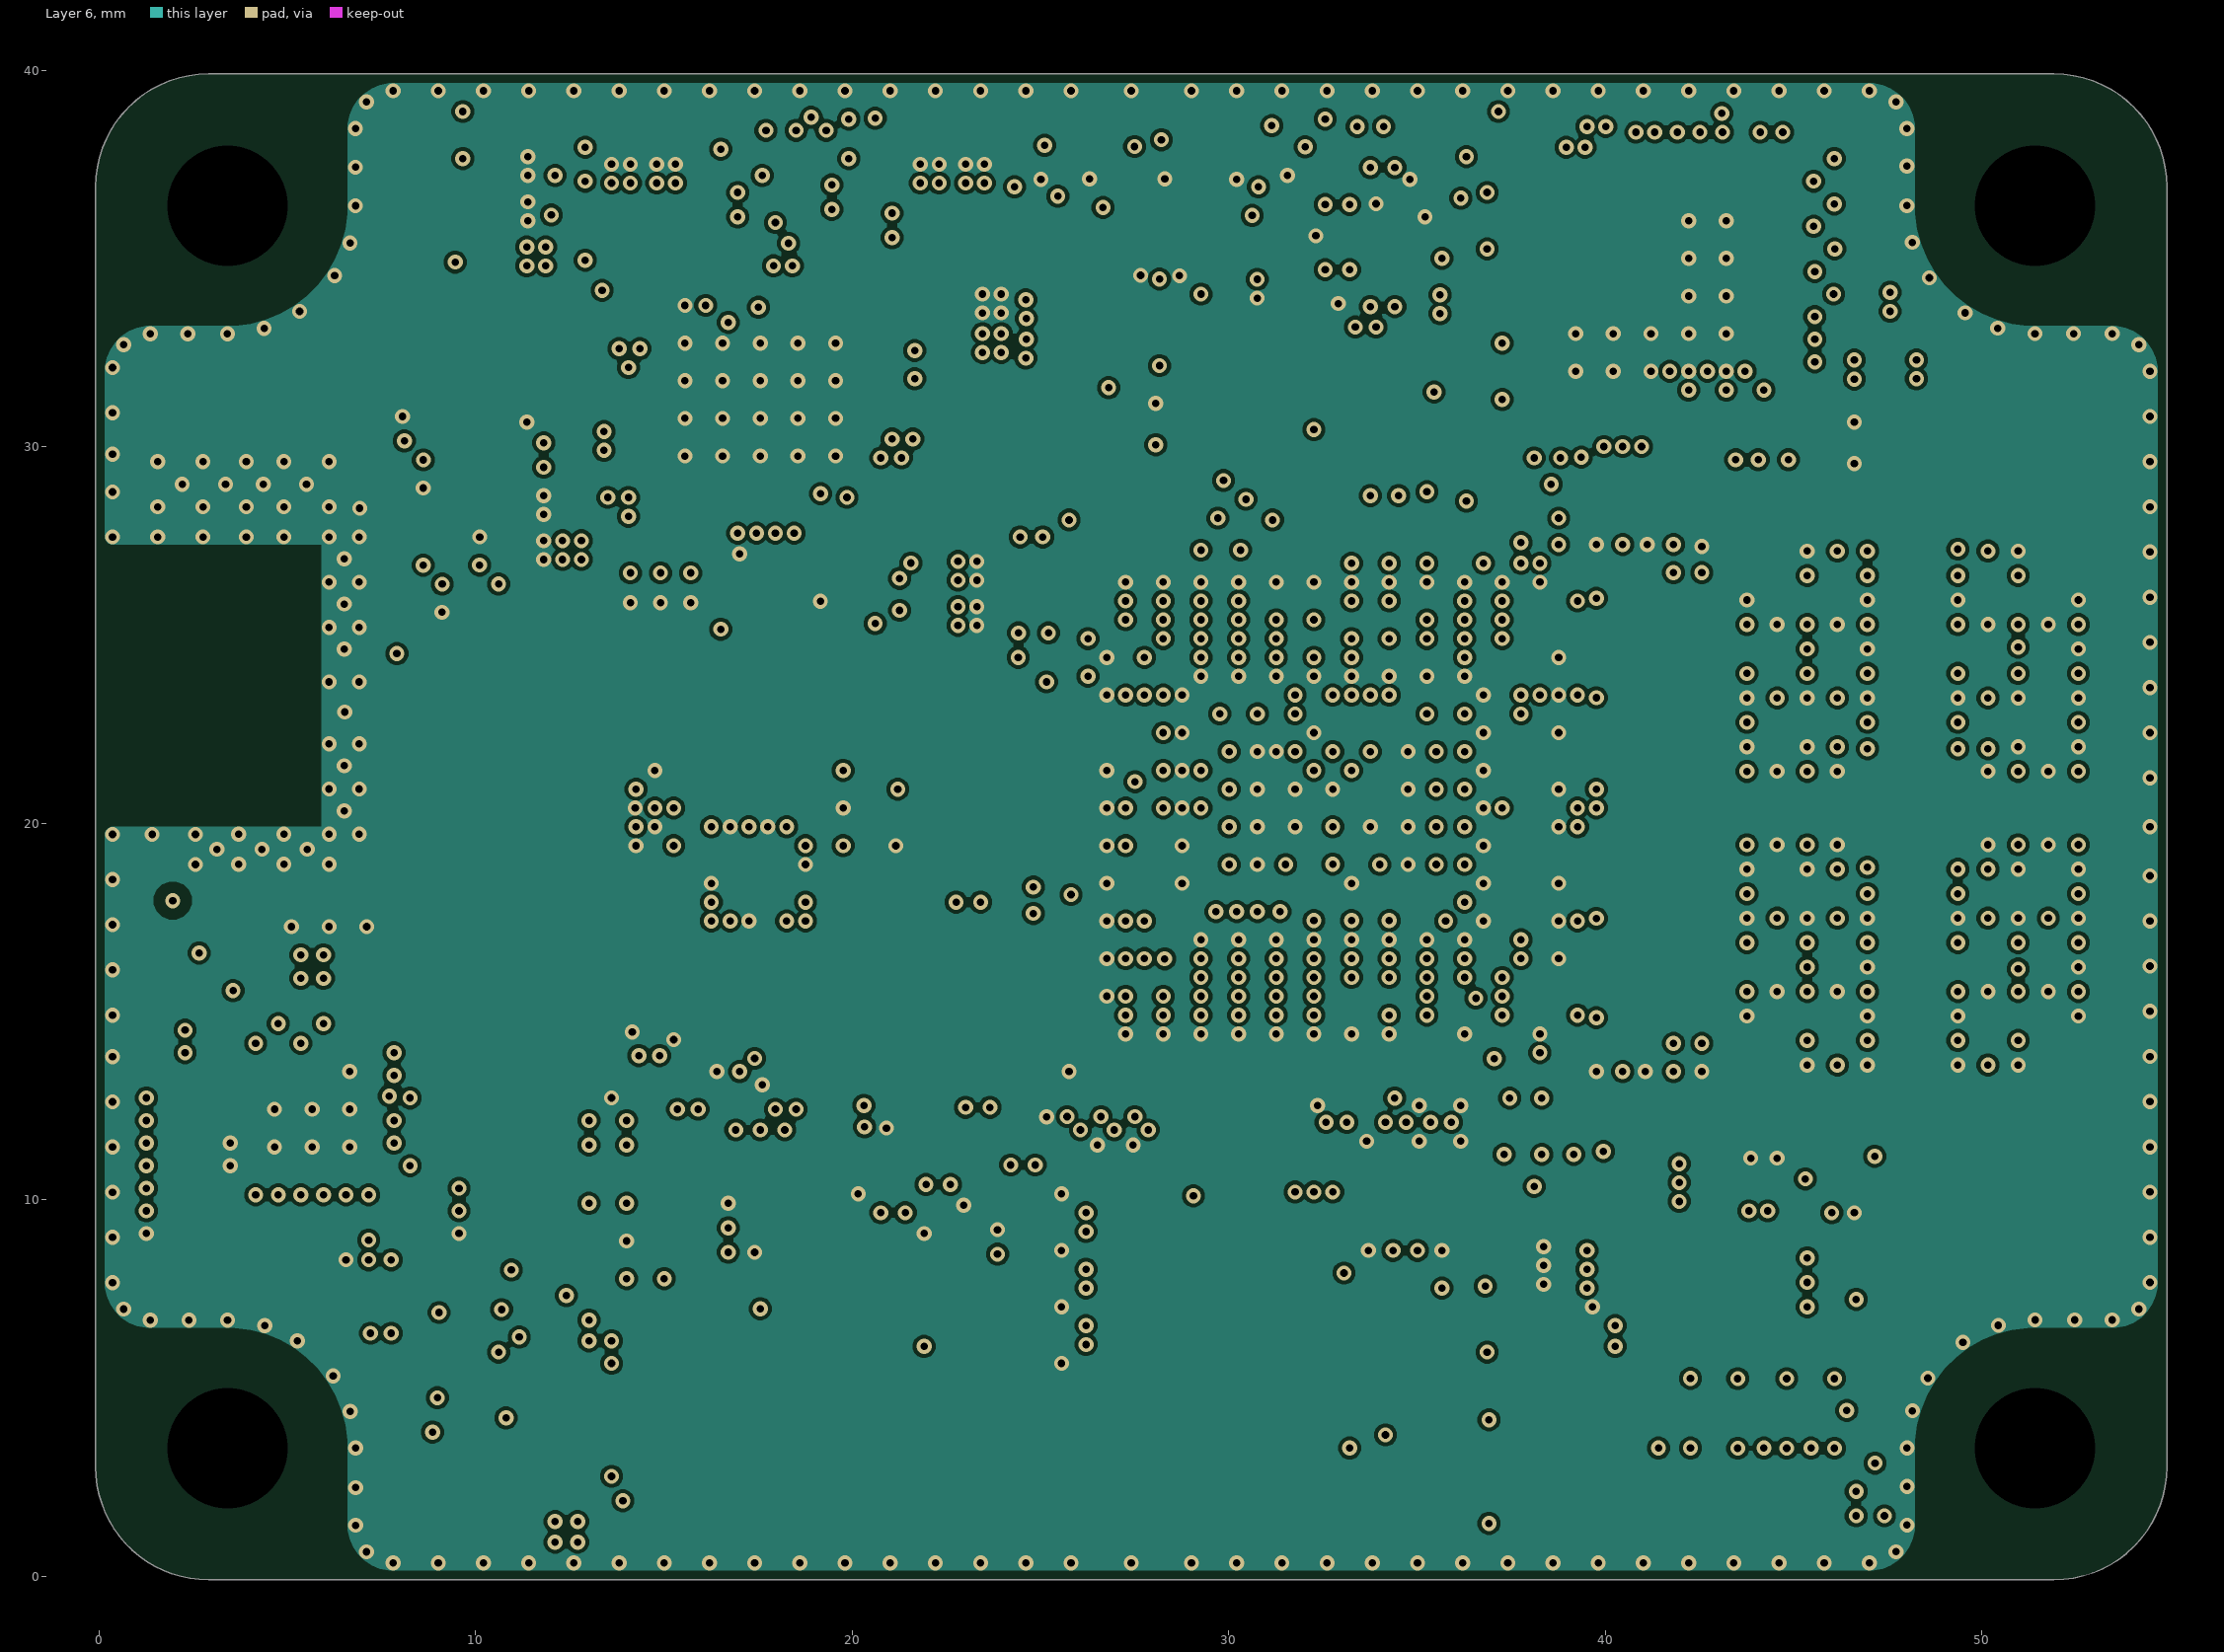
[diagram p7: Layer 6]
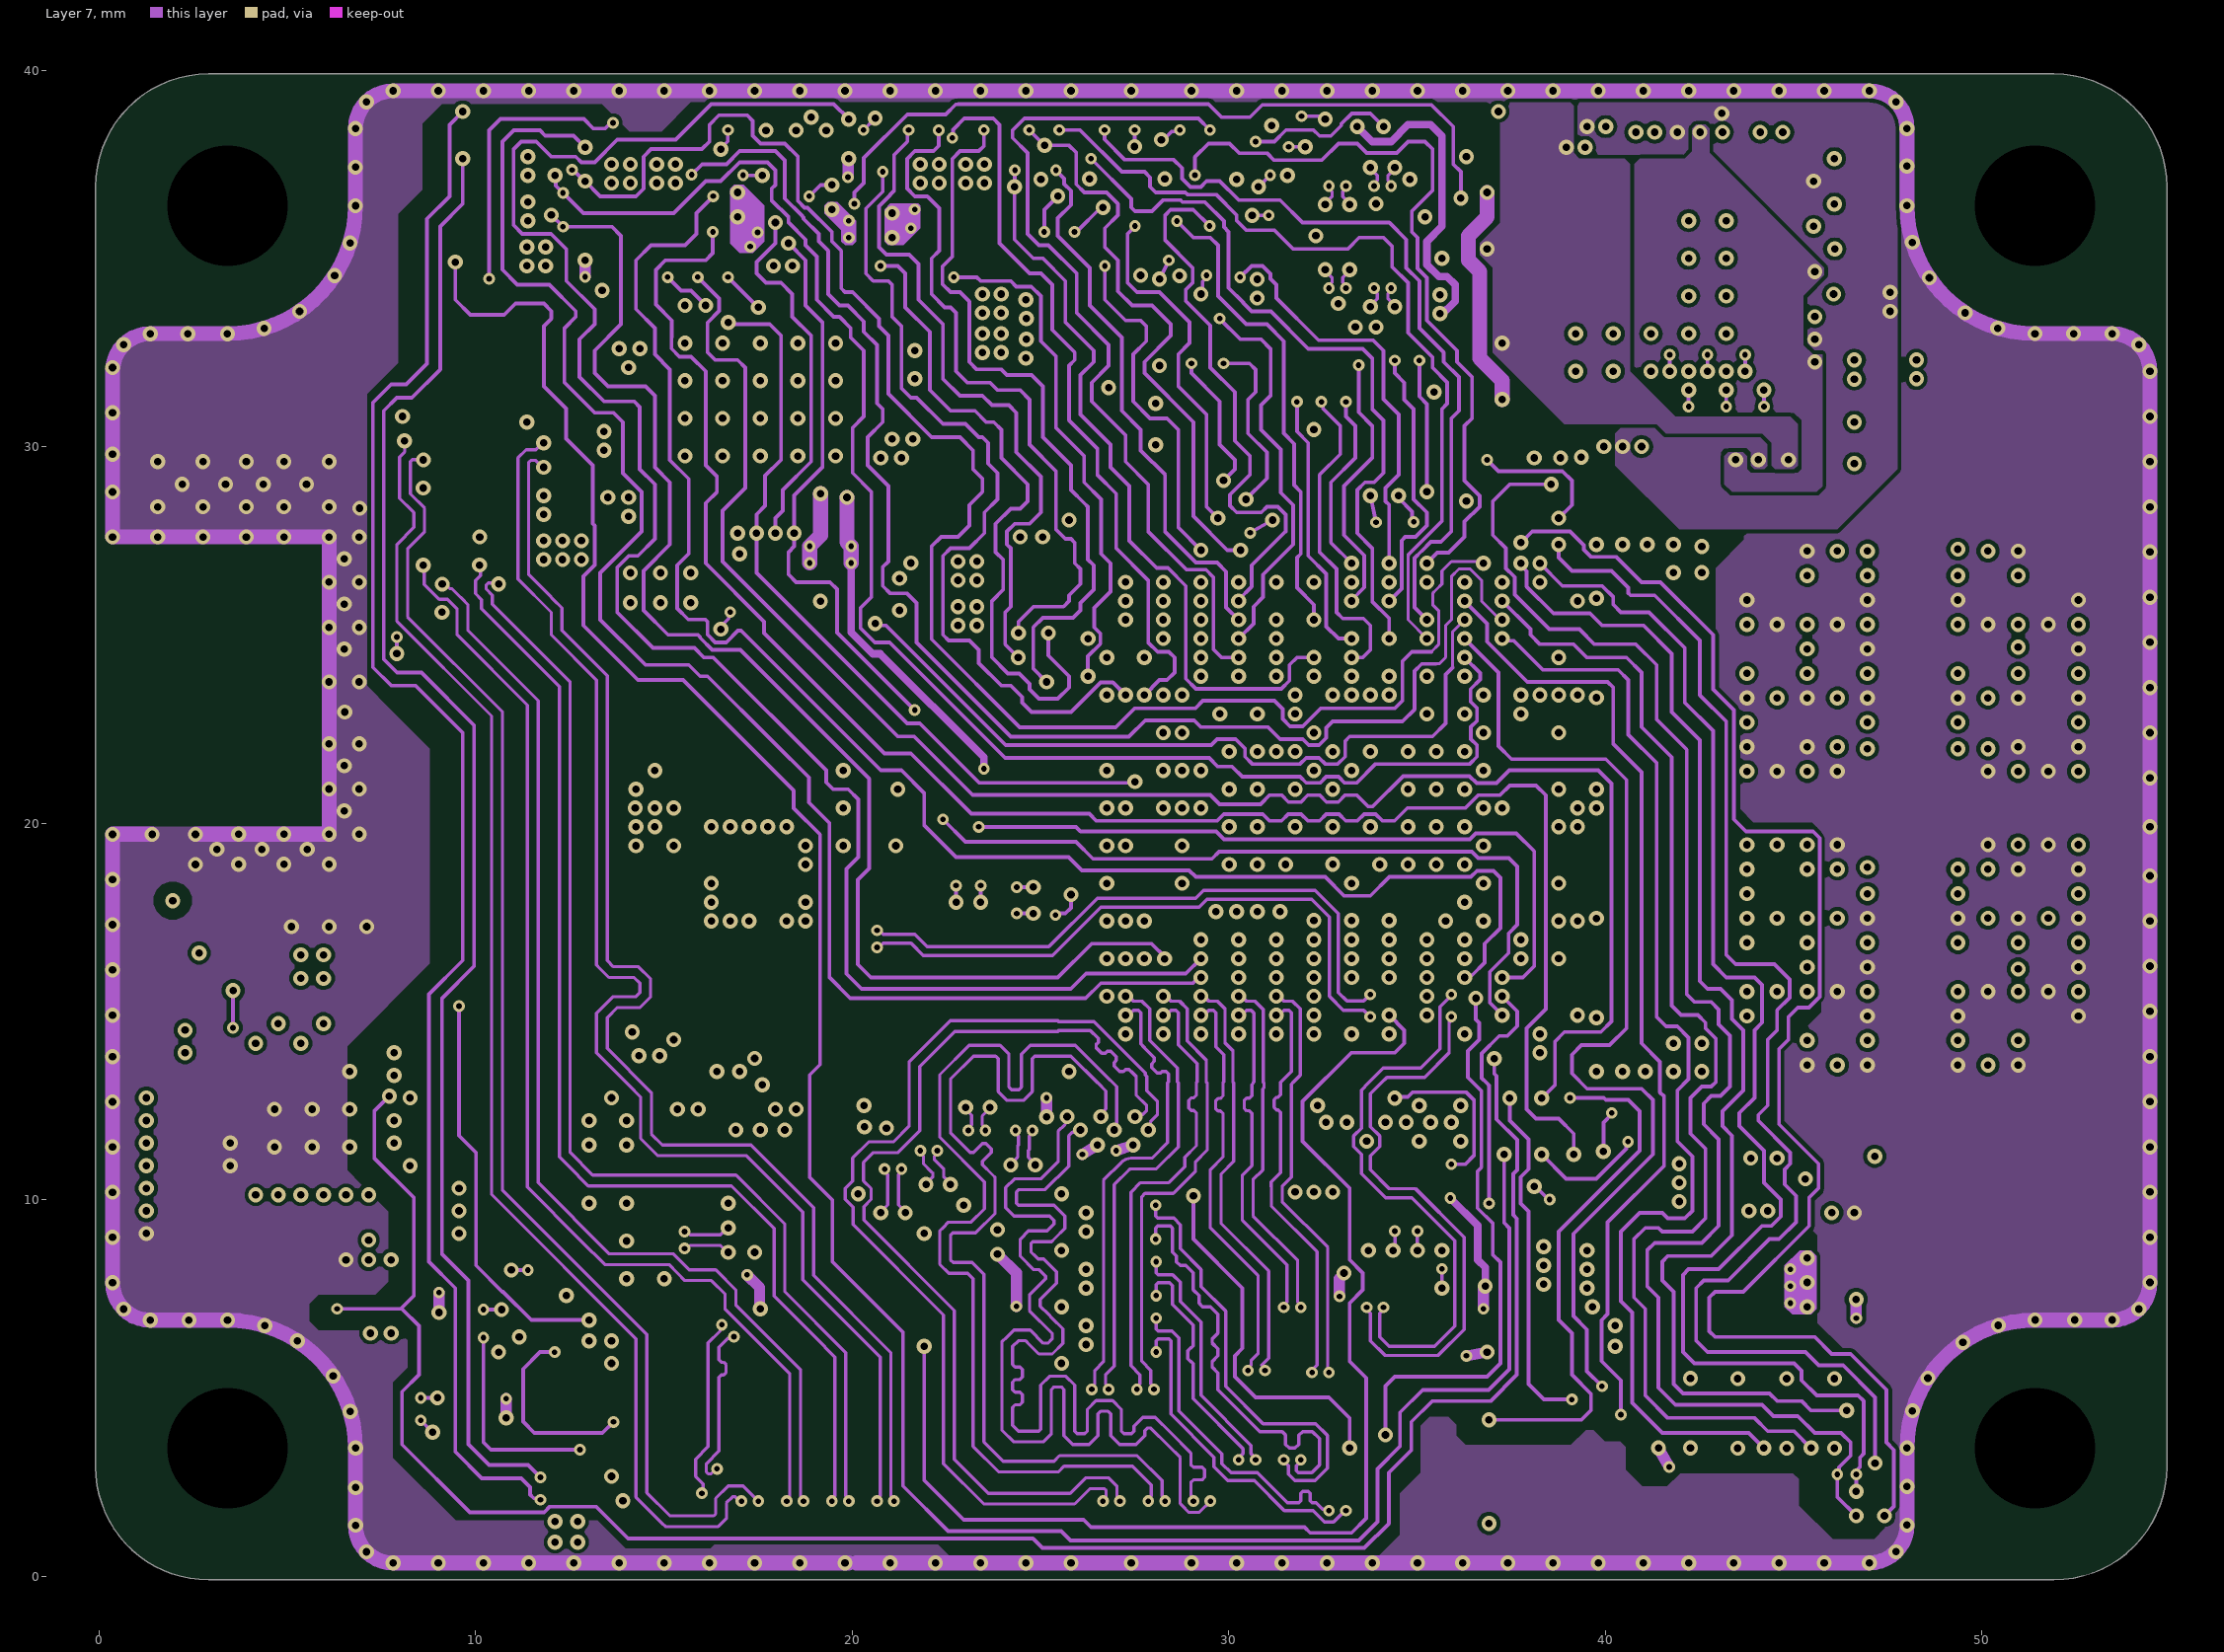
[diagram p8: Layer 7]
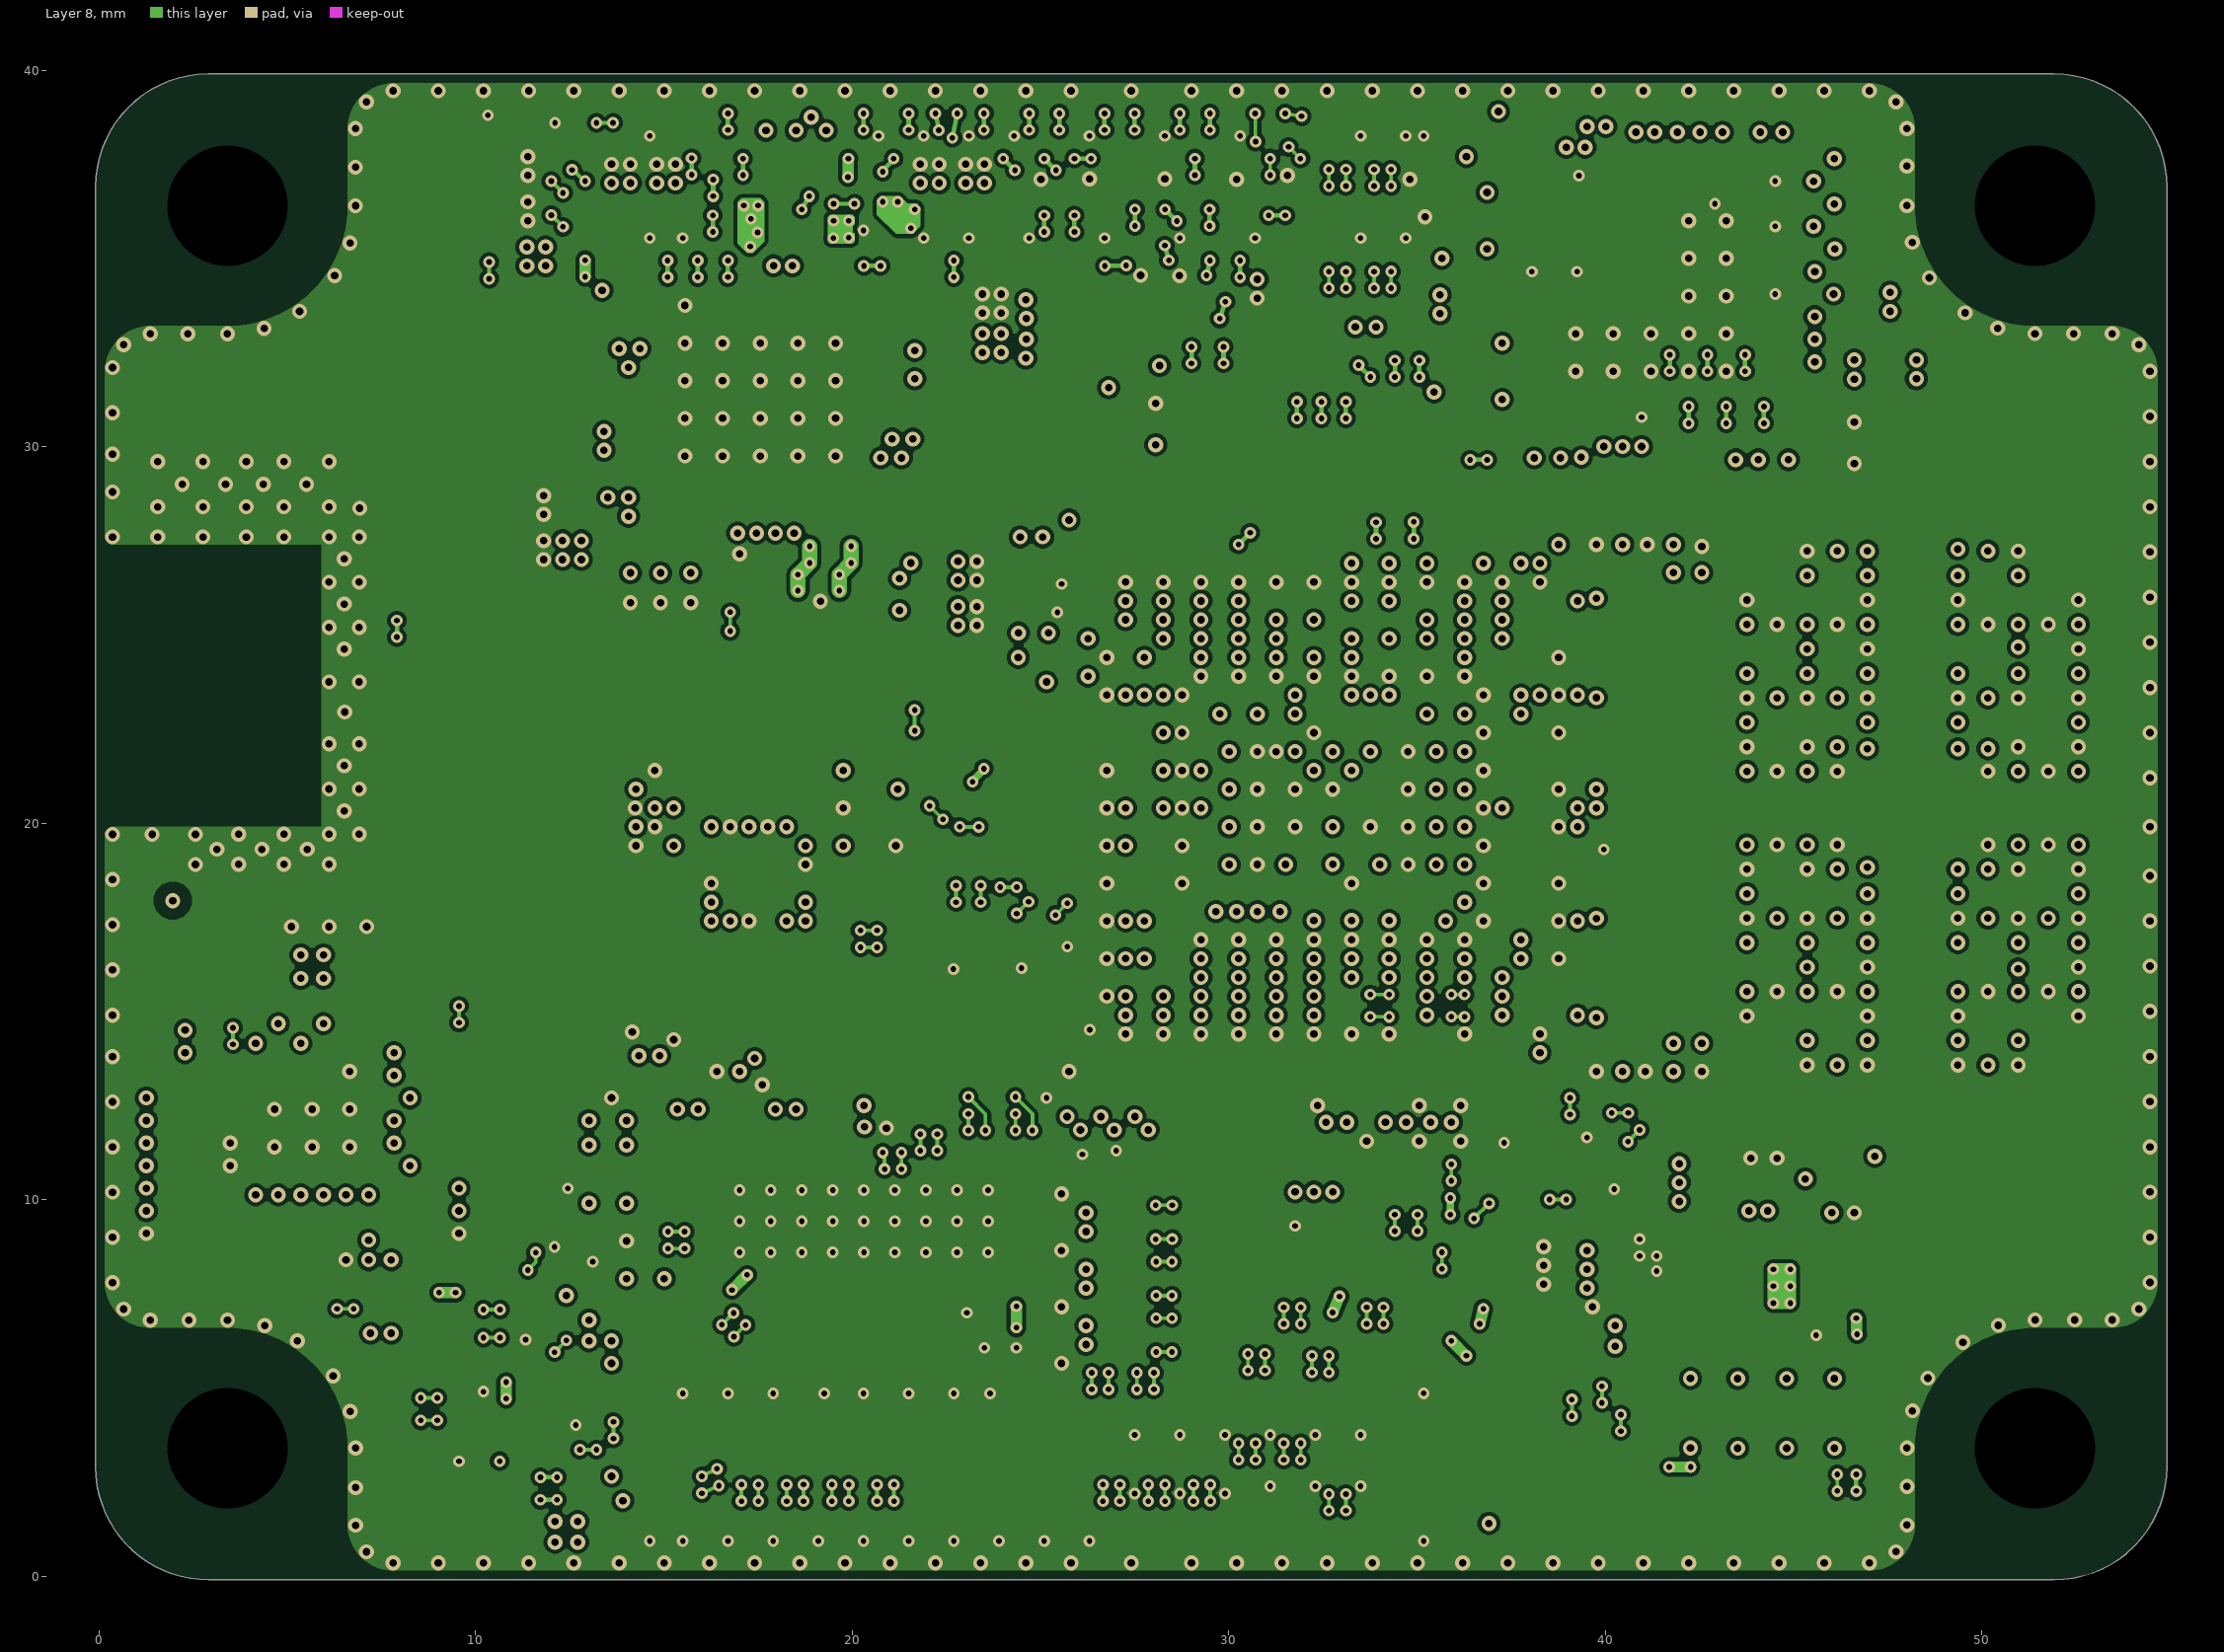
[diagram p9: Layer 8]
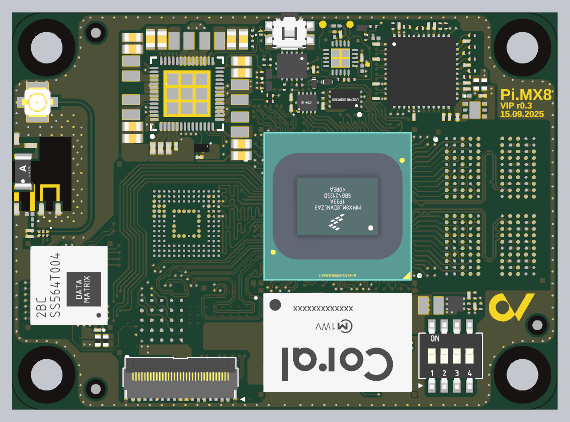
[diagram p19: 3D render of the assembled board from above, using the file's embedded part models]
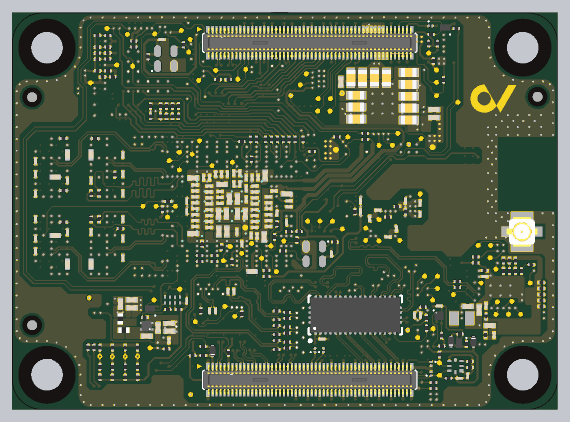
[diagram p20: 3D render of the assembled board from below, using the file's embedded part models]

## Layer stack, top to bottom
Top Solder: solder mask 0.01, Solder Resist, Dk 3.5
Top Layer: signal copper 0.036
Dielectric 1: prepreg 0.075, PP-1080, Dk 4
Layer 1: signal copper 0.035
Dielectric 2: prepreg 0.055, PP-106, Dk 4
Dielectric 3: prepreg 0.055, PP-106, Dk 4
Layer 2: signal copper 0.035
Core 1: core 0.2, S1000H, Dk 4.6
Layer 3: signal copper 0.035
Dielectric 4: prepreg 0.075, PP-1080, Dk 4
Layer 4: signal copper 0.035
Core 2: core 0.2, Core-043, Dk 4.6
Layer 5: signal copper 0.035
Dielectric 5: prepreg 0.075, PP-1080, Dk 4
Layer 6: signal copper 0.035
Core 3: core 0.2, S1000H, Dk 4.6
Layer 7: signal copper 0.035
Dielectric 6: prepreg 0.055, PP-106, Dk 4
Dielectric 7: prepreg 0.055, PP-106, Dk 4
Layer 8: signal copper 0.035
Dielectric 8: prepreg 0.075, PP-1080, Dk 4
Bottom Layer: signal copper 0.036
Bottom Solder: solder mask 0.01, Solder Resist, Dk 3.5

## Board outline
2.912,-0.096 cw(c2.912,2.904) -0.088,2.904 -0.088,36.904 cw(c2.912,36.904) 2.912,39.904 51.912,39.904 cw(c51.912,36.904) 54.912,36.904 54.912,2.904 cw(c51.912,2.904) 51.912,-0.096

## Design rules (kind name [scope] priority, off if disabled: settings)
BoardOutlineClearance [All] p1: gap=0.2 ignorepadtopadclearanceinfootprint=FALSE
Clearance CLR_PWR_POLY [(IsRegion AND OnLayer('Layer 5') OR OnLayer('Layer 6')) vs IsRegion] p1: gap=0.2 ignorepadtopadclearanceinfootprint=FALSE
Clearance CLR_UNDER_BGA [(TouchesRoom('ROOM_CPU') OR TouchesRoom('ROOM_eMMC') OR TouchesRoom('ROOM_DRAM_1') OR TouchesRoom('ROOM_DRAM_2') OR TouchesRoom('ROOM_DRAM_3') OR TouchesRoom('ROOM_DRAM_4')) AND IsTrack] p2: gap=0.08 ignorepadtopadclearanceinfootprint=FALSE
Clearance CLR_CU_RF-PATH [InNetClass('RF_PATH') vs IsRegion] p3: gap=0.3 ignorepadtopadclearanceinfootprint=FALSE
Clearance CLR_GENERAL [All] p4: gap=0.1 ignorepadtopadclearanceinfootprint=FALSE
ComponentClearance CLR_NET_TIE [HasFootprint('Net_Tie_0.2mm')] p1: gap=-1 collisioncheckmode=3 verticalgap=-1 showdistances=FALSE
ComponentClearance CLR_TESTPOINT [HasFootprint('TP_0.50MM') vs HasFootprint('TP_0.50MM')] p2: gap=0.85 collisioncheckmode=3 verticalgap=0.2 showdistances=TRUE
ComponentClearance [All] p3: gap=0.2 collisioncheckmode=3 verticalgap=0.2 showdistances=FALSE
DiffPairsRouting DIFF_UNDER_BGA [TouchesRoom('ROOM_CPU') OR TouchesRoom('ROOM_DRAM_1') OR TouchesRoom('ROOM_DRAM_2') OR TouchesRoom('ROOM_DRAM_3') OR TouchesRoom('ROOM_DRAM_4')] p1: maxlimit=0.254 minlimit=0.08 mostfreqgap=0.254 toplayer_maxgap=0.12 toplayer_prefgap=0.08 toplayer_minwidth=0.08 toplayer_maxwidth=0.13 toplayer_prefwidth=0.08 midlayer1_minwidth=0.08 midlayer1_maxwidth=0.381 midlayer1_prefwidth=0.381 midlayer2_mingap=0.15 midlayer2_maxgap=0.15 midlayer2_prefgap=0.15 midlayer2_minwidth=0.08 midlayer2_maxwidth=0.09 midlayer2_prefwidth=0.09 midlayer3_minwidth=0.08 midlayer3_maxwidth=0.381 midlayer3_prefwidth=0.381 midlayer4_minwidth=0.08 midlayer4_maxwidth=0.381 midlayer4_prefwidth=0.381 midlayer5_minwidth=0.08 midlayer5_maxwidth=0.381 midlayer5_prefwidth=0.381 midlayer6_minwidth=0.08 midlayer6_maxwidth=0.381 midlayer6_prefwidth=0.381 midlayer7_mingap=0.15 midlayer7_maxgap=0.15 midlayer7_prefgap=0.15 midlayer7_minwidth=0.08 midlayer7_maxwidth=0.09 midlayer7_prefwidth=0.09 midlayer8_minwidth=0.08 midlayer8_maxwidth=0.381 midlayer8_prefwidth=0.381 bottomlayer_mingap=0.12 bottomlayer_maxgap=0.12 bottomlayer_prefgap=0.12 bottomlayer_minwidth=0.08 bottomlayer_maxwidth=0.13 bottomlayer_prefwidth=0.11 maxuncoupledlength=12.7
DiffPairsRouting DIFF_100 [InDifferentialPairClass('DIFF100')] p2: maxlimit=0.254 minlimit=0.13 mostfreqgap=0.254 toplayer_maxgap=0.13 toplayer_prefgap=0.13 toplayer_minwidth=0.1 toplayer_maxwidth=0.1 toplayer_prefwidth=0.1 midlayer1_prefgap=0.13 midlayer1_minwidth=0.1 midlayer1_maxwidth=0.381 midlayer1_prefwidth=0.1 midlayer2_mingap=0.2 midlayer2_maxgap=0.2 midlayer2_prefgap=0.2 midlayer2_minwidth=0.085 midlayer2_maxwidth=0.085 midlayer2_prefwidth=0.085 midlayer3_minwidth=0.381 midlayer3_maxwidth=0.381 midlayer3_prefwidth=0.381 midlayer4_minwidth=0.381 midlayer4_maxwidth=0.381 midlayer4_prefwidth=0.381 midlayer5_minwidth=0.381 midlayer5_maxwidth=0.381 midlayer5_prefwidth=0.381 midlayer6_minwidth=0.381 midlayer6_maxwidth=0.381 midlayer6_prefwidth=0.381 midlayer7_mingap=0.2 midlayer7_maxgap=0.2 midlayer7_prefgap=0.2 midlayer7_minwidth=0.085 midlayer7_maxwidth=0.085 midlayer7_prefwidth=0.085 midlayer8_prefgap=0.13 midlayer8_minwidth=0.1 midlayer8_maxwidth=0.381 midlayer8_prefwidth=0.1 bottomlayer_maxgap=0.13 bottomlayer_prefgap=0.13 bottomlayer_minwidth=0.1 bottomlayer_maxwidth=0.1 bottomlayer_prefwidth=0.1 maxuncoupledlength=12.7
DiffPairsRouting DIFF_90 [InDifferentialPairClass('DIFF90')] p3: maxlimit=0.254 minlimit=0.12 mostfreqgap=0.127 toplayer_maxgap=0.12 toplayer_prefgap=0.12 toplayer_minwidth=0.11 toplayer_maxwidth=0.11 toplayer_prefwidth=0.11 midlayer1_minwidth=0.1 midlayer1_maxwidth=0.381 midlayer1_prefwidth=0.381 midlayer2_mingap=0.15 midlayer2_maxgap=0.15 midlayer2_prefgap=0.15 midlayer2_minwidth=0.09 midlayer2_maxwidth=0.09 midlayer2_prefwidth=0.09 midlayer3_minwidth=0.381 midlayer3_maxwidth=0.381 midlayer3_prefwidth=0.381 midlayer4_minwidth=0.381 midlayer4_maxwidth=0.381 midlayer4_prefwidth=0.381 midlayer5_minwidth=0.381 midlayer5_maxwidth=0.381 midlayer5_prefwidth=0.381 midlayer6_minwidth=0.381 midlayer6_maxwidth=0.381 midlayer6_prefwidth=0.381 midlayer7_mingap=0.15 midlayer7_maxgap=0.15 midlayer7_prefgap=0.15 midlayer7_minwidth=0.09 midlayer7_maxwidth=0.09 midlayer7_prefwidth=0.09 midlayer8_minwidth=0.1 midlayer8_maxwidth=0.381 midlayer8_prefwidth=0.381 bottomlayer_maxgap=0.12 bottomlayer_prefgap=0.12 bottomlayer_minwidth=0.11 bottomlayer_maxwidth=0.11 bottomlayer_prefwidth=0.11 maxuncoupledlength=12.7
DiffPairsRouting DIFF_85 [InDifferentialPairClass('DIFF85')] p4: maxlimit=0.254 minlimit=0.12 mostfreqgap=0.254 toplayer_maxgap=0.12 toplayer_prefgap=0.12 toplayer_minwidth=0.13 toplayer_maxwidth=0.13 toplayer_prefwidth=0.13 midlayer1_minwidth=0.1 midlayer1_maxwidth=0.381 midlayer1_prefwidth=0.381 midlayer2_maxgap=0.12 midlayer2_prefgap=0.12 midlayer2_minwidth=0.09 midlayer2_maxwidth=0.09 midlayer2_prefwidth=0.09 midlayer3_minwidth=0.381 midlayer3_maxwidth=0.381 midlayer3_prefwidth=0.381 midlayer4_minwidth=0.381 midlayer4_maxwidth=0.381 midlayer4_prefwidth=0.381 midlayer5_minwidth=0.381 midlayer5_maxwidth=0.381 midlayer5_prefwidth=0.381 midlayer6_minwidth=0.381 midlayer6_maxwidth=0.381 midlayer6_prefwidth=0.381 midlayer7_maxgap=0.12 midlayer7_prefgap=0.12 midlayer7_minwidth=0.09 midlayer7_maxwidth=0.09 midlayer7_prefwidth=0.09 midlayer8_minwidth=0.1 midlayer8_maxwidth=0.381 midlayer8_prefwidth=0.381 bottomlayer_maxgap=0.12 bottomlayer_prefgap=0.12 bottomlayer_minwidth=0.13 bottomlayer_maxwidth=0.13 bottomlayer_prefwidth=0.13 maxuncoupledlength=12.7
Height Height_Top [(OnLayer('Top Layer'))] p1: minheight=0 maxheight=2.35 prefheight=2
Height Height_Bot [(OnLayer('Bottom Layer'))] p2: minheight=0 maxheight=1.3 prefheight=1
HoleSize [All] p1: absolutevalues=TRUE maxlimit=6 minlimit=0.15 maxpercent=80.000 minpercent=20.000
HoleToHoleClearance HTH_CLR [IsThruVia vs IsThruVia] p1: gap=0.295 allowstackedmicrovias=FALSE
HoleToHoleClearance HTH_CLR_BURIED_VIA [IsBuriedVia vs IsBuriedVia] p2: gap=0.45 allowstackedmicrovias=FALSE
HoleToHoleClearance HTH_CLR_uVIA [IsMicroVia vs IsMicroVia] p3: gap=0.2 allowstackedmicrovias=FALSE
MatchedLengths MTCH_xSIG_PCIe_DIFF [InxSignalClass('PCIe')] p1: tolerance=25.4 checknetsindiffpair=TRUE checkdiffpairvsdiffpair=FALSE checkxsignals=FALSE checkothers=FALSE usedelayunits=TRUE delaytolerance=2.000000
MatchedLengths MTCH_xSIG_DIFF [(InNetClass('DSI1') OR InNetClass('LVDS0'))] p2: tolerance=25.4 checknetsindiffpair=TRUE checkdiffpairvsdiffpair=FALSE checkxsignals=FALSE checkothers=FALSE usedelayunits=TRUE delaytolerance=2.000000
MatchedLengths MTCH_DIFF [InDifferentialPairClass('All Differential Pairs')] p3: tolerance=0.15 checknetsindiffpair=TRUE checkdiffpairvsdiffpair=FALSE checkxsignals=FALSE checkothers=FALSE usedelayunits=TRUE delaytolerance=2.000000
MatchedLengths MTCH_CAM1 [InNetClass('BB_CON_CAM1')] p4: tolerance=25.4 checknetsindiffpair=FALSE checkdiffpairvsdiffpair=TRUE checkxsignals=TRUE checkothers=TRUE usedelayunits=TRUE delaytolerance=10.000000
MatchedLengths MTCH_CAM0 [InNetClass('BB_CON_CAM0')] p5: tolerance=25.4 checknetsindiffpair=FALSE checkdiffpairvsdiffpair=TRUE checkxsignals=TRUE checkothers=TRUE usedelayunits=TRUE delaytolerance=10.000000
MatchedLengths DSI1 [InxSignalClass('DSI1')] p6: tolerance=25.4 checknetsindiffpair=FALSE checkdiffpairvsdiffpair=TRUE checkxsignals=TRUE checkothers=TRUE usedelayunits=TRUE delaytolerance=10.000000
MatchedLengths LVDS0 [InxSignalClass('LVDS0')] p7: tolerance=25.4 checknetsindiffpair=FALSE checkdiffpairvsdiffpair=TRUE checkxsignals=TRUE checkothers=TRUE usedelayunits=TRUE delaytolerance=10.000000
MatchedLengths RGMII_RX [InxSignalClass('RGMII_RX')] p8: tolerance=25.4 checknetsindiffpair=FALSE checkdiffpairvsdiffpair=TRUE checkxsignals=TRUE checkothers=TRUE usedelayunits=TRUE delaytolerance=150.000000
MatchedLengths HDMI [InxSignalClass('HDMI')] p9: tolerance=25.4 checknetsindiffpair=FALSE checkdiffpairvsdiffpair=TRUE checkxsignals=TRUE checkothers=TRUE usedelayunits=TRUE delaytolerance=150.000000
MatchedLengths RGMII_TX [InxSignalClass('RGMII_TX')] p10: tolerance=25.4 checknetsindiffpair=FALSE checkdiffpairvsdiffpair=TRUE checkxsignals=TRUE checkothers=TRUE usedelayunits=TRUE delaytolerance=150.000000
MatchedLengths DRAM_A_DATA_LANE0 [InxSignalClass('DRAM_A_DATA_LANE0')] p11: tolerance=25.4 checknetsindiffpair=FALSE checkdiffpairvsdiffpair=TRUE checkxsignals=TRUE checkothers=TRUE usedelayunits=TRUE delaytolerance=50.000000
MatchedLengths DRAM_B_DATA_LANE0 [InxSignalClass('DRAM_B_DATA_LANE0')] p12: tolerance=25.4 checknetsindiffpair=FALSE checkdiffpairvsdiffpair=TRUE checkxsignals=TRUE checkothers=TRUE usedelayunits=TRUE delaytolerance=50.000000
MatchedLengths DRAM_B_DATA_LANE1 [InxSignalClass('DRAM_B_DATA_LANE1')] p13: tolerance=25.4 checknetsindiffpair=FALSE checkdiffpairvsdiffpair=TRUE checkxsignals=TRUE checkothers=TRUE usedelayunits=TRUE delaytolerance=50.000000
MatchedLengths DRAM_A_DATA_LANE1 [InxSignalClass('DRAM_A_DATA_LANE1')] p14: tolerance=25.4 checknetsindiffpair=FALSE checkdiffpairvsdiffpair=TRUE checkxsignals=TRUE checkothers=TRUE usedelayunits=TRUE delaytolerance=50.000000
MatchedLengths DRAM_A_CA0-3 [InxSignalClass('DRAM_A_CA0-3')] p15: tolerance=25.4 checknetsindiffpair=FALSE checkdiffpairvsdiffpair=TRUE checkxsignals=TRUE checkothers=TRUE usedelayunits=TRUE delaytolerance=2.000000
MatchedLengths DRAM_B_CA0-3 [InxSignalClass('DRAM_B_CA0-3')] p16: tolerance=25.4 checknetsindiffpair=FALSE checkdiffpairvsdiffpair=TRUE checkxsignals=TRUE checkothers=TRUE usedelayunits=TRUE delaytolerance=2.000000
MatchedLengths DRAM_A_CA4_CA5 [InxSignalClass('DRAM_A_CA4_CA5')] p17: tolerance=25.4 checknetsindiffpair=FALSE checkdiffpairvsdiffpair=TRUE checkxsignals=TRUE checkothers=TRUE usedelayunits=TRUE delaytolerance=2.000000
MatchedLengths DRAM_B_CA4_CA5 [InxSignalClass('DRAM_B_CA4_CA5')] p18: tolerance=25.4 checknetsindiffpair=FALSE checkdiffpairvsdiffpair=TRUE checkxsignals=TRUE checkothers=TRUE usedelayunits=TRUE delaytolerance=2.000000
MatchedLengths DRAM_A_CKEx_CSx [InxSignalClass('DRAM_A_CKE1/2_CS1/2')] p19: tolerance=25.4 checknetsindiffpair=FALSE checkdiffpairvsdiffpair=TRUE checkxsignals=TRUE checkothers=TRUE usedelayunits=TRUE delaytolerance=2.000000
MatchedLengths DRAM_B_CKEx_CSx [InxSignalClass('DRAM_B_CKE1/2_CS1/2')] p20: tolerance=25.4 checknetsindiffpair=FALSE checkdiffpairvsdiffpair=TRUE checkxsignals=TRUE checkothers=TRUE usedelayunits=TRUE delaytolerance=2.000000
MatchedLengths MTCH_eMMC [InNetClass('eMMC')] p21: tolerance=25.4 checknetsindiffpair=FALSE checkdiffpairvsdiffpair=TRUE checkxsignals=TRUE checkothers=TRUE usedelayunits=TRUE delaytolerance=100.000000
MinimumSolderMaskSliver [All] p1: minsoldermaskwidth=0.04
PolygonConnect [All] p1: thpad.connectstyle=Relief thpad.reliefconductorwidth=0.25 thpad.reliefentries=4 thpad.polygonreliefangle="90 Angle" thpad.airgapwidth=0.15 smdpad.connectstyle=Direct smdpad.reliefconductorwidth=0.254 smdpad.reliefentries=4 smdpad.polygonreliefangle="90 Angle" smdpad.airgapwidth=0.254 via.connectstyle=Direct via.reliefconductorwidth=0.254 via.reliefentries=4 via.polygonreliefangle="90 Angle" via.airgapwidth=0.254
RoomDefinition ROOM_eMMC [False] p1: confinementstyle=ConfineIn formatcopy=TRUE lockcomponents=FALSE outline 14.012,15.154 21.012,15.154 21.012,22.154 14.012,22.154
RoomDefinition ROOM_DRAM_4 [False] p2: confinementstyle=ConfineIn formatcopy=TRUE lockcomponents=FALSE outline 43.512,13.354 47.212,13.354 47.212,19.654 43.512,19.654
RoomDefinition ROOM_DRAM_3 [False] p3: confinementstyle=ConfineIn formatcopy=TRUE lockcomponents=FALSE outline 49.112,13.354 52.812,13.354 52.812,19.654 49.112,19.654
RoomDefinition ROOM_DRAM_2 [False] p4: confinementstyle=ConfineIn formatcopy=TRUE lockcomponents=FALSE outline 49.112,21.154 52.812,21.154 52.812,27.454 49.112,27.454
RoomDefinition ROOM_DRAM_1 [False] p5: confinementstyle=ConfineIn formatcopy=TRUE lockcomponents=FALSE outline 43.512,21.154 47.212,21.154 47.212,27.454 43.512,27.454
RoomDefinition ROOM_CPU [False] p6: confinementstyle=ConfineIn formatcopy=TRUE lockcomponents=FALSE outline 25.462,13.104 40.062,13.104 40.062,27.704 25.462,27.704
RoomDefinition U_03_8MPLUS_PWR [InComponentClass('U_03_8MPLUS_PWR')] p7: confinementstyle=ConfineOut formatcopy=TRUE lockcomponents=FALSE outline 61.812,19.204 106.062,19.204 106.062,38.054 61.812,38.054
RoomDefinition U_02_8MPLUS_PMIC [InComponentClass('U_02_8MPLUS_PMIC')] p8: confinementstyle=ConfineOut formatcopy=TRUE lockcomponents=FALSE outline 61.812,7.404 106.062,7.404 106.062,17.954 61.812,17.954
RoomDefinition U_04_8MPLUS_DRAM [InComponentClass('U_04_8MPLUS_DRAM')] p9: confinementstyle=ConfineOut formatcopy=TRUE lockcomponents=FALSE outline 61.812,39.304 100.562,39.304 100.562,43.254 61.812,43.254
RoomDefinition U_05_8MPLUS_CFG [InComponentClass('U_05_8MPLUS_CFG')] p10: confinementstyle=ConfineOut formatcopy=TRUE lockcomponents=FALSE outline 61.812,44.504 106.062,44.504 106.062,55.254 61.812,55.254
RoomDefinition U_16_FPC_Connector_Debug [InComponentClass('U_16_FPC_Connector_Debug')] p11: confinementstyle=ConfineOut formatcopy=TRUE lockcomponents=FALSE outline 107.412,68.204 117.662,68.204 117.662,81.905 107.412,81.905
RoomDefinition U_15_BTB_Connector_P101-P200 [InComponentClass('U_15_BTB_Connector_P101-P200')] p12: confinementstyle=ConfineOut formatcopy=TRUE lockcomponents=FALSE outline 16.912,58.185 60.412,58.185 60.412,68.314 16.912,68.314
RoomDefinition U_14_BTB_Connector_P1-P100 [InComponentClass('U_14_BTB_Connector_P1-P100')] p13: confinementstyle=ConfineOut formatcopy=TRUE lockcomponents=FALSE outline 107.222,44.609 151.412,44.609 151.412,54.758 107.222,54.758
RoomDefinition U_13_Interface_Options [InComponentClass('U_13_Interface_Options')] p14: confinementstyle=ConfineOut formatcopy=TRUE lockcomponents=FALSE outline 16.137,69.213 60.337,69.213 60.337,81.863 16.137,81.863
RoomDefinition U_12_Coral_Edge_TPU [InComponentClass('U_12_Coral_Edge_TPU')] p15: confinementstyle=ConfineOut formatcopy=TRUE lockcomponents=FALSE outline 61.862,68.335 106.012,68.335 106.012,87.585 61.862,87.585
RoomDefinition U_11_WIFI_BLE_Module [InComponentClass('U_11_WIFI_BLE_Module')] p16: confinementstyle=ConfineOut formatcopy=TRUE lockcomponents=FALSE outline 107.487,55.563 151.687,55.563 151.687,67.213 107.487,67.213
RoomDefinition U_10_Gbit_Ethernet [InComponentClass('U_10_Gbit_Ethernet')] p17: confinementstyle=ConfineOut formatcopy=TRUE lockcomponents=FALSE outline 16.137,46.863 60.337,46.863 60.337,57.413 16.137,57.413
RoomDefinition U_09_eMMC_Flash [InComponentClass('U_09_eMMC_Flash')] p18: confinementstyle=ConfineOut formatcopy=TRUE lockcomponents=FALSE outline 107.237,26.734 151.437,26.734 151.437,43.583 107.237,43.583
RoomDefinition U_08_DRAM_LPDDR4 [InComponentClass('U_08_DRAM_LPDDR4')] p19: confinementstyle=ConfineOut formatcopy=TRUE lockcomponents=FALSE outline 107.237,7.333 151.437,7.333 151.437,25.733 107.237,25.733
RoomDefinition U_07_8MPLUS_PHY [InComponentClass('U_07_8MPLUS_PHY')] p20: confinementstyle=ConfineOut formatcopy=TRUE lockcomponents=FALSE outline 61.812,63.404 106.062,63.404 106.062,67.404 61.812,67.404
RoomDefinition U_06_8MPLUS_IO [InComponentClass('U_06_8MPLUS_IO')] p21: confinementstyle=ConfineOut formatcopy=TRUE lockcomponents=FALSE outline 61.812,56.504 106.062,56.504 106.062,62.154 61.812,62.154
RoutingCorners [All] p1: cornerstyle=45-Degree minsetback=0.1 maxsetback=0.4
RoutingLayers Routing_Layers_Single_Ended [Not IsDifferentialPair] p1: top layer_v5=TRUE mid layer 1_v5=TRUE mid layer 2_v5=TRUE mid layer 3_v5=TRUE mid layer 4_v5=TRUE mid layer 5_v5=TRUE mid layer 6_v5=TRUE mid layer 7_v5=TRUE mid layer 8_v5=TRUE bottom layer_v5=TRUE
RoutingLayers [InDifferentialPairClass('All Differential Pairs')] p2: top layer_v5=TRUE mid layer 1_v5=FALSE mid layer 2_v5=TRUE mid layer 3_v5=FALSE mid layer 4_v5=FALSE mid layer 5_v5=FALSE mid layer 6_v5=FALSE mid layer 7_v5=TRUE mid layer 8_v5=FALSE bottom layer_v5=TRUE
RoutingVias VIA_LASER [IsMicroVia] p1: holewidth=0.15 width=0.31 viastyle="Through Hole" minholewidth=0.15 minwidth=0.31 maxholewidth=0.15 maxwidth=0.31
RoutingVias VIA_BURIED [IsBuriedVia] p2: holewidth=0.2 width=0.4 viastyle="Through Hole" minholewidth=0.2 minwidth=0.4 maxholewidth=0.5 maxwidth=1
RoutingVias VIA_THRU [IsThruVia] p3: holewidth=0.2 width=0.4 viastyle="Through Hole" minholewidth=0.2 minwidth=0.4 maxholewidth=1 maxwidth=1.5
SilkToSolderMaskClearance [IsPad] p1: minsilkscreentomaskgap=0.15 clearancetoexposedcopper=TRUE
SolderMaskExpansion [All] p1: expansion=0.04 istentingtop=FALSE
SupplyNets "Schematic Supply Nets_12" [InNet('GND')] p1: voltage=0.000
SupplyNets "Schematic Supply Nets_11" [InNet('VCCA1.8_SYS')] p2: voltage=0.000
SupplyNets "Schematic Supply Nets_10" [InNet('VCC1.8_SNVS')] p3: voltage=0.000
SupplyNets "Schematic Supply Nets_9" [InNet('WIFI_VCCIO')] p4: voltage=0.000
SupplyNets "Schematic Supply Nets_8" [InNet('VCC_SOC')] p5: voltage=0.000
SupplyNets "Schematic Supply Nets_7" [InNet('VCC1.8_SYS')] p6: voltage=0.000
SupplyNets "Schematic Supply Nets_6" [InNet('TPU_VIN')] p7: voltage=0.000
SupplyNets "Schematic Supply Nets_5" [InNet('ETH_VDDIO')] p8: voltage=0.000
SupplyNets "Schematic Supply Nets_4" [InNet('DRAM_VCC1.1')] p9: voltage=0.000
SupplyNets "Schematic Supply Nets_3" [InNet('VCC3.3_SYS')] p10: voltage=0.000
SupplyNets "Schematic Supply Nets_2" [InNet('TPU_AON')] p11: voltage=0.000
SupplyNets "Schematic Supply Nets_1" [InNet('VCC_ARM')] p12: voltage=0.000
SupplyNets "Schematic Supply Nets" [InNet('VCC_SD2')] p13: voltage=0.000
Width WIDTH_UNDER_BGA [(TouchesRoom('ROOM_CPU') OR TouchesRoom('ROOM_DRAM_1') OR TouchesRoom('ROOM_DRAM_2') OR TouchesRoom('ROOM_DRAM_3') OR TouchesRoom('ROOM_DRAM_4') OR TouchesRoom('ROOM_eMMC'))] p1: maxlimit=4 minlimit=0.08 preferedwidth=0.1 toplayer_prefwidth=0.12 midlayer1_minwidth=0.1 midlayer3_minwidth=0.1 midlayer4_minwidth=0.1 midlayer5_minwidth=0.1 midlayer6_minwidth=0.1 midlayer8_minwidth=0.1 bottomlayer_prefwidth=0.12 minimp=50.000000 maximp=50.000000 favimp=50.000000
Width WIDTH_50R [InNetClass('SNGL_50')] p2: maxlimit=0.254 minlimit=0.08 preferedwidth=0.254 toplayer_minwidth=0.12 toplayer_maxwidth=0.12 toplayer_prefwidth=0.12 midlayer1_minwidth=0.12 midlayer1_prefwidth=0.12 midlayer2_maxwidth=0.1 midlayer2_prefwidth=0.1 midlayer3_minwidth=0.254 midlayer4_minwidth=0.254 midlayer5_minwidth=0.254 midlayer6_minwidth=0.254 midlayer7_maxwidth=0.1 midlayer7_prefwidth=0.1 midlayer8_minwidth=0.12 midlayer8_prefwidth=0.12 bottomlayer_minwidth=0.12 bottomlayer_maxwidth=0.12 bottomlayer_prefwidth=0.12 minimp=50.000000 maximp=50.000000 favimp=50.000000
Width WIDTH_General [All] p3: maxlimit=4 minlimit=0.08 preferedwidth=0.1 toplayer_minwidth=0.1 midlayer1_minwidth=0.1 midlayer3_minwidth=0.1 midlayer4_minwidth=0.1 midlayer5_minwidth=0.1 midlayer6_minwidth=0.1 midlayer8_minwidth=0.1 bottomlayer_minwidth=0.1 minimp=50.000000 maximp=50.000000 favimp=50.000000
21 further rules are at their usual default settings.

## Classes and differential pairs
net class PMIC: PMIC_32K_OUT PMIC_INT_B PMIC_ON_REQ PMIC_POR_B PMIC_SCL PMIC_SDA PMIC_STBY_REQ SYS_RST WDOG_B
net class WIFI_USB: WIFI_USB_N WIFI_USB_P
net class WIFI_SDIO: SDIO_CLK SDIO_CMD SDIO_DATA_0 SDIO_DATA_1 SDIO_DATA_2 SDIO_DATA_3
net class VSNOR_SPI: VSNOR_SPI_MISO VSNOR_SPI_MOSI VSNOR_SPI_SCLK VSNOR_SPI_SS0
net class USNOR_QSPI: USNOR_QSPI_DATA0 USNOR_QSPI_DATA1 USNOR_QSPI_DATA2 USNOR_QSPI_DATA3 USNOR_QSPI_SCLK USNOR_QSPI_SS0_B
net class TPU_PCIe: TPU_PCIe_CLK_N TPU_PCIe_CLK_P TPU_PCIe_RX_N TPU_PCIe_RX_P TPU_PCIe_TX_N TPU_PCIe_TX_P
net class SNGL_50: BT_PCM_CLK BT_PCM_IN BT_PCM_OUT BT_PCM_SYNC BT_UART_CTS_N BT_UART_RTS_N BT_UART_RXD BT_UART_TXD CM4_GPIO0 CM4_GPIO1 CM4_GPIO2 CM4_GPIO3 CM4_GPIO4 CM4_GPIO5 CM4_GPIO6 CM4_GPIO7 CM4_GPIO8 CM4_GPIO9 CM4_GPIO10 CM4_GPIO11 CM4_GPIO12 CM4_GPIO13 CM4_GPIO14 CM4_GPIO15 CM4_GPIO16 CM4_GPIO17 CM4_GPIO18 CM4_GPIO19 CM4_GPIO20 CM4_GPIO21 CM4_GPIO22 CM4_GPIO23 CM4_GPIO24 CM4_GPIO25 CM4_GPIO26 CM4_GPIO27 DRAM_A_CA0 DRAM_A_CA1 DRAM_A_CA2 DRAM_A_CA3 DRAM_A_CA4 DRAM_A_CA5 DRAM_A_CKE0 DRAM_A_CKE1 DRAM_A_CS0 DRAM_A_CS1 DRAM_A_DATA0 DRAM_A_DATA1 DRAM_A_DATA2 DRAM_A_DATA3 DRAM_A_DATA4 DRAM_A_DATA5 DRAM_A_DATA6 DRAM_A_DATA7 DRAM_A_DATA8 DRAM_A_DATA9 DRAM_A_DATA10 DRAM_A_DATA11 DRAM_A_DATA12 DRAM_A_DATA13 DRAM_A_DATA14 DRAM_A_DATA15 DRAM_A_DMI0 DRAM_A_DMI1 DRAM_B_CA0 DRAM_B_CA1 DRAM_B_CA2 DRAM_B_CA3 DRAM_B_CA4 DRAM_B_CA5 DRAM_B_CKE0 DRAM_B_CKE1 DRAM_B_CS0 DRAM_B_CS1 DRAM_B_DATA0 DRAM_B_DATA1 DRAM_B_DATA2 DRAM_B_DATA3 DRAM_B_DATA4 DRAM_B_DATA5 DRAM_B_DATA6 DRAM_B_DATA7 DRAM_B_DATA8 DRAM_B_DATA9 DRAM_B_DATA10 DRAM_B_DATA11 DRAM_B_DATA12 DRAM_B_DATA13 DRAM_B_DATA14 DRAM_B_DATA15 DRAM_B_DMI0 DRAM_B_DMI1 ENET_125O_SYNCE ENET_125O_SYNCE_R ENET_LED3/GPIO2 ENET_MDC ENET_MDIO ENET_RD0 ENET_RD0_R ENET_RD1 ENET_RD1_R ENET_RD2 ENET_RD2_R ENET_RD3 ENET_RD3_R ENET_RX_CTL ENET_RX_CTL_R ENET_RXC ENET_RXC_R ENET_TD0 ENET_TD0_R ENET_TD1 ENET_TD1_R ENET_TD2 ENET_TD2_R ENET_TD3 ENET_TD3_R ENET_TX_CTL ENET_TX_CTL_R ENET_TXC ENET_TXC_R SAI2_MCLK SAI2_RXD0 SAI2_TX/RX_FS SAI2_TXD0 SD2_CD_B SD2_CLK SD2_CMD SD2_DATA0 SD2_DATA1 SD2_DATA2 SD2_DATA3 SD3_CLK SD3_CMD SD3_DATA0 SD3_DATA1 SD3_DATA2 SD3_DATA3 SD3_DATA4 SD3_DATA5 SD3_DATA6 SD3_DATA7 SD3_RESET SD3_STROBE SDIO_CLK SDIO_CMD SDIO_DATA_0 SDIO_DATA_1 SDIO_DATA_2 SDIO_DATA_3 USNOR_QSPI_DATA0 USNOR_QSPI_DATA1 USNOR_QSPI_DATA2 USNOR_QSPI_DATA3 USNOR_QSPI_SCLK USNOR_QSPI_SS0_B VSNOR_SPI_MISO VSNOR_SPI_MOSI VSNOR_SPI_SCLK VSNOR_SPI_SS0
net class RGMII_TX: ENET_TD0 ENET_TD0_R ENET_TD1 ENET_TD1_R ENET_TD2 ENET_TD2_R ENET_TD3 ENET_TD3_R ENET_TX_CTL ENET_TX_CTL_R ENET_TXC ENET_TXC_R
net class RGMII_RX: ENET_RD0 ENET_RD0_R ENET_RD1 ENET_RD1_R ENET_RD2 ENET_RD2_R ENET_RD3 ENET_RD3_R ENET_RX_CTL ENET_RX_CTL_R ENET_RXC ENET_RXC_R
net class LVDS0: LVDS0_CLK_N LVDS0_CLK_P LVDS0_TX0_N LVDS0_TX0_P LVDS0_TX1_N LVDS0_TX1_P LVDS0_TX2_N LVDS0_TX2_P LVDS0_TX3_N LVDS0_TX3_P
net class DBG_CON_USB: DBG_CON_USB_D_N DBG_CON_USB_D_P DBG_CON_USB_RX_N DBG_CON_USB_RX_P DBG_CON_USB_TX_N DBG_CON_USB_TX_P DBG_CON_USB_VBUS
net class CM4_GPIO[0..27]: CM4_GPIO0 CM4_GPIO1 CM4_GPIO2 CM4_GPIO3 CM4_GPIO4 CM4_GPIO5 CM4_GPIO6 CM4_GPIO7 CM4_GPIO8 CM4_GPIO9 CM4_GPIO10 CM4_GPIO11 CM4_GPIO12 CM4_GPIO13 CM4_GPIO14 CM4_GPIO15 CM4_GPIO16 CM4_GPIO17 CM4_GPIO18 CM4_GPIO19 CM4_GPIO20 CM4_GPIO21 CM4_GPIO22 CM4_GPIO23 CM4_GPIO24 CM4_GPIO25 CM4_GPIO26 CM4_GPIO27
net class BT_UART: BT_UART_CTS_N BT_UART_RTS_N BT_UART_RXD BT_UART_TXD
net class BT_PCM: BT_PCM_CLK BT_PCM_IN BT_PCM_OUT BT_PCM_SYNC
net class BB_CON_USB: BB_CON_USB_D_N BB_CON_USB_D_P
net class BB_CON_PCIe: BB_CON_PCIE_CLK_N BB_CON_PCIE_CLK_P BB_CON_PCIE_RX_N BB_CON_PCIE_RX_P BB_CON_PCIEC_TX_N BB_CON_PCIEC_TX_P
net class BB_CON_LVDS/DSI: BB_CON_LVDS/DSI_CLK_N BB_CON_LVDS/DSI_CLK_P BB_CON_LVDS/DSI_D0_N BB_CON_LVDS/DSI_D0_P BB_CON_LVDS/DSI_D1_N BB_CON_LVDS/DSI_D1_P BB_CON_LVDS/DSI_D2_N BB_CON_LVDS/DSI_D2_P BB_CON_LVDS/DSI_D3_N BB_CON_LVDS/DSI_D3_P
net class BB_CON_HDMI0: BB_CON_HDMI0_CEC_DYN BB_CON_HDMI0_CLK_N BB_CON_HDMI0_CLK_P BB_CON_HDMI0_HPD_DYN BB_CON_HDMI0_SCL_DYN BB_CON_HDMI0_SDA_DYN BB_CON_HDMI0_TX0_N BB_CON_HDMI0_TX0_P BB_CON_HDMI0_TX1_N BB_CON_HDMI0_TX1_P BB_CON_HDMI0_TX2_N BB_CON_HDMI0_TX2_P
net class BB_CON_CAM1: BB_CON_CAM1_CLK_N BB_CON_CAM1_CLK_P BB_CON_CAM1_D0_N BB_CON_CAM1_D0_P BB_CON_CAM1_D1_N BB_CON_CAM1_D1_P BB_CON_CAM1_D2_N BB_CON_CAM1_D2_P BB_CON_CAM1_D3_N BB_CON_CAM1_D3_P
net class BB_CON_CAM0: BB_CON_CAM0_CLK_N BB_CON_CAM0_CLK_P BB_CON_CAM0_D0_N BB_CON_CAM0_D0_P BB_CON_CAM0_D1_N BB_CON_CAM0_D1_P
component class U_16_FPC_Connector_Debug: J5
component class U_15_BTB_Connector_P101-P200: C106 C196 C197 D4 D5 D6 D7 D8 D9 D10 J4 Q7 R162 R163 R164 R165 R167 R168 R169 R170 R171 R172 R173 R174 TP104 TP105 U18 U22
component class U_14_BTB_Connector_P1-P100: C195 D2 D3 D11 J3 Q2 Q3 Q4 Q5 R25 R151 R152 R153 R154 R155 R156 R157 R158 R159 R160 R161 TP97 TP98 TP99 TP100 TP101 TP102 TP103 U12
component class U_13_Interface_Options: C192 C193 C194 L11 L12 L13 R136 R137 R138 R139 R140 R141 R142 R143 R144 R145 R146 R147 R148 R149 R150 TP92 TP93 TP94 TP95 TP96 U16 U17
component class U_12_Coral_Edge_TPU: C182 C183 C184 C185 C186 C187 C188 C189 C190 C191 C198 J6 L10 Q1 R127 R128 R129 R130 R131 R132 R133 R134 R135 R185 TP84 TP85 TP86 TP87 TP88 TP89 TP90 TP91 U13 U14 U15
component class U_11_WIFI_BLE_Module: ANT1 C167 C168 C169 C170 C171 C172 C173 C174 C175 C176 C177 C178 C179 C180 C181 J1 J2 L9 L14 L15 R105 R106 R107 R108 R109 R110 R111 R113 R114 R115 R116 R117 R118 R119 R120 R121 R122 R123 R124 R125 R126 R183 R184 TP72 TP73 TP74 TP75 TP76 TP77 TP78 TP79 TP80 TP81 TP82 TP83 U10 U11
component class U_10_Gbit_Ethernet: C105 C149 C150 C151 C152 C153 C154 C155 C156 C157 C158 C159 C160 C161 C162 C163 C164 L7 L8 R67 R68 R69 R70 R71 R72 R73 R74 R75 R76 R77 R78 R79 R80 R81 R82 R83 R84 R85 R86 R87 R88 R89 R90 R91 R92 R93 R94 R95 R96 R97 R98 R99 R100 R101 R102 R103 R104 R177 R178 R179 R180 R181 R182 R186 TP60 TP61 TP62 TP63 TP64 TP65 TP66 TP67 TP68 TP70 TP71 U8 U9 U21
component class U_09_eMMC_Flash: C137 C138 C139 C140 C141 C142 C143 C144 C145 C146 C147 C148 R58 R59 R60 R61 R62 R63 R64 R65 R66 TP43 TP44 TP45 TP46 TP47 TP48 TP49 TP50 TP51 TP52 TP53 TP54 TP55 TP56 TP57 TP58 TP59 U5 U6 U7
component class U_08_DRAM_LPDDR4: C115 C116 C117 C118 C119 C120 C121 C122 C123 C124 C125 C126 C127 C128 C129 C130 C131 C132 C133 C134 C135 C136 R48 R49 R50 R51 R52 R53 R54 R55 R56 R57 U4
component class U_07_8MPLUS_PHY: C110 C111 C112 C113 C114 R39 R40 R41 R42 R43 R44 R45 R46 R47
component class U_06_8MPLUS_IO: C107 C108 C109 R31 R32 R33 R34 R35 R36 R37 R38 U3
component class U_05_8MPLUS_CFG: C30 D1 R8 R9 R12 R13 R14 R15 R16 R17 R18 R19 R20 R21 R22 R23 R24 R26 R27 R28 R29 R30 R112 SW1 SW2 TP24 TP25 TP26 TP27 TP28 TP29 TP30 TP31 TP32 TP33 TP34 TP35 TP36 TP37 TP39 U20
component class U_04_8MPLUS_DRAM: R10 R11 TP20 TP21 TP22 TP23
component class U_03_8MPLUS_PWR: C34 C35 C36 C37 C38 C39 C40 C41 C42 C43 C44 C45 C46 C47 C48 C49 C50 C51 C52 C53 C54 C55 C56 C57 C58 C59 C60 C61 C62 C63 C64 C65 C66 C67 C68 C69 C70 C71 C72 C73 C74 C75 C76 C77 C78 C79 C80 C81 C82 C83 C84 C85 C86 C87 C88 C89 C90 C91 C92 C93 C94 C95 C96 C97 C98 C99 C100 C101 C102 C103 C104 NT1 NT2 U2
component class U_02_8MPLUS_PMIC: C1 C2 C3 C4 C5 C6 C7 C8 C9 C10 C11 C12 C13 C14 C15 C16 C17 C18 C19 C20 C21 C22 C23 C24 C25 C26 C27 C28 C29 C31 C32 C33 L1 L2 L3 L4 L5 L6 R1 R2 R3 R4 R5 R6 R7 R175 R176 TP1 TP2 TP3 TP4 TP5 TP6 TP7 TP8 TP9 TP10 TP11 TP12 TP13 TP14 TP15 TP16 TP17 TP18 TP19 U1 U19
differential pair class DIFF100: BB_CON_CAM0_CLK BB_CON_CAM0_D0 BB_CON_CAM0_D1 BB_CON_CAM1_CLK BB_CON_CAM1_D0 BB_CON_CAM1_D1 BB_CON_CAM1_D2 BB_CON_CAM1_D3 BB_CON_HDMI0_CLK BB_CON_HDMI0_TX0 BB_CON_HDMI0_TX1 BB_CON_HDMI0_TX2 BB_CON_LVDS/DSI_CLK BB_CON_LVDS/DSI_D0 BB_CON_LVDS/DSI_D1 BB_CON_LVDS/DSI_D2 BB_CON_LVDS/DSI_D3 CSI1_CLK CSI1_D0 CSI1_D1 CSI1_D2 CSI1_D3 CSI2_CLK CSI2_D0 CSI2_D1 DSI1_CLK DSI1_D0 DSI1_D1 DSI1_D2 DSI1_D3 ETH_TRX0 ETH_TRX1 ETH_TRX2 ETH_TRX3 HDMI_TX0 HDMI_TX1 HDMI_TX2 HDMI_TXC LVDS0_CLK LVDS0_TX0 LVDS0_TX1 LVDS0_TX2 LVDS0_TX3 LVDS1_CLK LVDS1_TX0 LVDS1_TX1
differential pair class DIFF90: BB_CON_USB_D DBG_CON_USB_C_TX DBG_CON_USB_D DBG_CON_USB_RX DBG_CON_USB_TX USB1_D WIFI_USB WIFI_USB_R
differential pair class DIFF85: BB_CON_PCIE_CLK BB_CON_PCIE_RX BB_CON_PCIEC_TX DRAM_A_CLK DRAM_A_DQS0 DRAM_A_DQS1 DRAM_B_CLK DRAM_B_DQS0 DRAM_B_DQS1 PCIE_CLK PCIE_RX PCIE_TX PCIEC_TX PCIEC_TX_C TPU_PCIe_CLK TPU_PCIe_RX TPU_PCIe_TX
net class eMMC: SD3_CLK SD3_CMD SD3_DATA0 SD3_DATA1 SD3_DATA2 SD3_DATA3 SD3_DATA4 SD3_DATA5 SD3_DATA6 SD3_DATA7 SD3_STROBE
net class SD2: SD2_CD_B SD2_CLK SD2_CMD SD2_DATA0 SD2_DATA1 SD2_DATA2 SD2_DATA3
net class RF_PATH: CHIP_ANT CHIP_ANT_M EXT_ANT MOD_ANT
net class PWR: DRAM_VCC1.1 ENET_VDD ENET_VDDAH ENET_VDDAL ETH_VDDIO GND GPIO_VREF NetC23_1 NetC31_1 NetC193_1 NetC194_1 PMIX_LX1 PMIX_LX2 PMIX_LX3 PMIX_LX4 PMIX_LX5 PMIX_LX6 R_SNSP1 R_SNSP2 SD_PWR_ON TPU_1V8_LDO_IN TPU_3V3_BCK_IN TPU_AON TPU_PSU_SW TPU_VIN VCC1.8_SNVS VCC1.8_SYS VCC3.3_SYS VCC5.0_SYS VCC_ARM VCC_MIPI_1P2_CAP VCC_SD2 VCC_SNVS_0P8_CAP VCC_SOC VCCA1.8_SYS WIFI_BBPLL WIFI_VCC1.35 WIFI_VCCIO WIFI_VLX
net class PCIE: PCIE_CLK_N PCIE_CLK_P PCIE_RX_N PCIE_RX_P PCIEC_TX_N PCIEC_TX_P
net class ETH: ETH_TRX0_N ETH_TRX0_P ETH_TRX1_N ETH_TRX1_P ETH_TRX2_N ETH_TRX2_P ETH_TRX3_N ETH_TRX3_P
net class ENET: ENET_MDC ENET_MDIO ENET_RD0 ENET_RD0_R ENET_RD1 ENET_RD1_R ENET_RD2 ENET_RD2_R ENET_RD3 ENET_RD3_R ENET_RX_CTL ENET_RX_CTL_R ENET_RXC ENET_RXC_R ENET_TD0 ENET_TD0_R ENET_TD1 ENET_TD1_R ENET_TD2 ENET_TD2_R ENET_TD3 ENET_TD3_R ENET_TX_CTL ENET_TX_CTL_R ENET_TXC ENET_TXC_R
net class DSI1: DSI1_CLK_N DSI1_CLK_P DSI1_D0_N DSI1_D0_P DSI1_D1_N DSI1_D1_P DSI1_D2_N DSI1_D2_P DSI1_D3_N DSI1_D3_P
net class DRAM_B_DATA_CTRL: DRAM_B_DATA0 DRAM_B_DATA1 DRAM_B_DATA2 DRAM_B_DATA3 DRAM_B_DATA4 DRAM_B_DATA5 DRAM_B_DATA6 DRAM_B_DATA7 DRAM_B_DATA8 DRAM_B_DATA9 DRAM_B_DATA10 DRAM_B_DATA11 DRAM_B_DATA12 DRAM_B_DATA13 DRAM_B_DATA14 DRAM_B_DATA15 DRAM_B_DMI0 DRAM_B_DMI1 DRAM_B_DQS0_N DRAM_B_DQS0_P DRAM_B_DQS1_N DRAM_B_DQS1_P
net class DRAM_B_CMD: DRAM_B_CA0 DRAM_B_CA1 DRAM_B_CA2 DRAM_B_CA3 DRAM_B_CA4 DRAM_B_CA5 DRAM_B_CKE0 DRAM_B_CKE1 DRAM_B_CLK_N DRAM_B_CLK_P DRAM_B_CS0 DRAM_B_CS1
net class DRAM_A_DATA_CTRL: DRAM_A_DATA0 DRAM_A_DATA1 DRAM_A_DATA2 DRAM_A_DATA3 DRAM_A_DATA4 DRAM_A_DATA5 DRAM_A_DATA6 DRAM_A_DATA7 DRAM_A_DATA8 DRAM_A_DATA9 DRAM_A_DATA10 DRAM_A_DATA11 DRAM_A_DATA12 DRAM_A_DATA13 DRAM_A_DATA14 DRAM_A_DATA15 DRAM_A_DMI0 DRAM_A_DMI1 DRAM_A_DQS0_N DRAM_A_DQS0_P DRAM_A_DQS1_N DRAM_A_DQS1_P
net class DRAM_A_CMD: DRAM_A_CA0 DRAM_A_CA1 DRAM_A_CA2 DRAM_A_CA3 DRAM_A_CA4 DRAM_A_CA5 DRAM_A_CKE0 DRAM_A_CKE1 DRAM_A_CLK_N DRAM_A_CLK_P DRAM_A_CS0 DRAM_A_CS1
differential pair WIFI_USB: +WIFI_USB_P -WIFI_USB_N
differential pair WIFI_USB_R: +WIFI_USB_R_P -WIFI_USB_R_N
differential pair TPU_PCIe_TX: +TPU_PCIe_TX_P -TPU_PCIe_TX_N
differential pair TPU_PCIe_RX: +TPU_PCIe_RX_P -TPU_PCIe_RX_N
differential pair TPU_PCIe_CLK: +TPU_PCIe_CLK_P -TPU_PCIe_CLK_N
differential pair PCIEC_TX: +PCIEC_TX_P -PCIEC_TX_N
differential pair PCIEC_TX_C: +PCIEC_TX_C_P -PCIEC_TX_C_N
differential pair LVDS0_TX3: +LVDS0_TX3_P -LVDS0_TX3_N
differential pair LVDS0_TX2: +LVDS0_TX2_P -LVDS0_TX2_N
differential pair LVDS0_TX1: +LVDS0_TX1_P -LVDS0_TX1_N
differential pair LVDS0_TX0: +LVDS0_TX0_P -LVDS0_TX0_N
differential pair LVDS0_CLK: +LVDS0_CLK_P -LVDS0_CLK_N
differential pair DBG_CON_USB_TX: +DBG_CON_USB_TX_P -DBG_CON_USB_TX_N
differential pair DBG_CON_USB_RX: +DBG_CON_USB_RX_P -DBG_CON_USB_RX_N
differential pair DBG_CON_USB_D: +DBG_CON_USB_D_P -DBG_CON_USB_D_N
differential pair DBG_CON_USB_C_TX: +DBG_CON_USB_C_TX_P -DBG_CON_USB_C_TX_N
differential pair BB_CON_USB_D: +BB_CON_USB_D_P -BB_CON_USB_D_N
differential pair BB_CON_PCIEC_TX: +BB_CON_PCIEC_TX_P -BB_CON_PCIEC_TX_N
differential pair BB_CON_PCIE_RX: +BB_CON_PCIE_RX_P -BB_CON_PCIE_RX_N
differential pair BB_CON_PCIE_CLK: +BB_CON_PCIE_CLK_P -BB_CON_PCIE_CLK_N
differential pair BB_CON_LVDS/DSI_D3: +BB_CON_LVDS/DSI_D3_P -BB_CON_LVDS/DSI_D3_N
differential pair BB_CON_LVDS/DSI_D2: +BB_CON_LVDS/DSI_D2_P -BB_CON_LVDS/DSI_D2_N
differential pair BB_CON_LVDS/DSI_D1: +BB_CON_LVDS/DSI_D1_P -BB_CON_LVDS/DSI_D1_N
differential pair BB_CON_LVDS/DSI_D0: +BB_CON_LVDS/DSI_D0_P -BB_CON_LVDS/DSI_D0_N
differential pair BB_CON_LVDS/DSI_CLK: +BB_CON_LVDS/DSI_CLK_P -BB_CON_LVDS/DSI_CLK_N
differential pair BB_CON_HDMI0_TX2: +BB_CON_HDMI0_TX2_P -BB_CON_HDMI0_TX2_N
differential pair BB_CON_HDMI0_TX1: +BB_CON_HDMI0_TX1_P -BB_CON_HDMI0_TX1_N
differential pair BB_CON_HDMI0_TX0: +BB_CON_HDMI0_TX0_P -BB_CON_HDMI0_TX0_N
differential pair BB_CON_HDMI0_CLK: +BB_CON_HDMI0_CLK_P -BB_CON_HDMI0_CLK_N
differential pair BB_CON_CAM1_D3: +BB_CON_CAM1_D3_P -BB_CON_CAM1_D3_N
differential pair BB_CON_CAM1_D2: +BB_CON_CAM1_D2_P -BB_CON_CAM1_D2_N
differential pair BB_CON_CAM1_D1: +BB_CON_CAM1_D1_P -BB_CON_CAM1_D1_N
differential pair BB_CON_CAM1_D0: +BB_CON_CAM1_D0_P -BB_CON_CAM1_D0_N
differential pair BB_CON_CAM1_CLK: +BB_CON_CAM1_CLK_P -BB_CON_CAM1_CLK_N
differential pair BB_CON_CAM0_D1: +BB_CON_CAM0_D1_P -BB_CON_CAM0_D1_N
differential pair BB_CON_CAM0_D0: +BB_CON_CAM0_D0_P -BB_CON_CAM0_D0_N
differential pair BB_CON_CAM0_CLK: +BB_CON_CAM0_CLK_P -BB_CON_CAM0_CLK_N
differential pair USB1_D: +USB1_D_P -USB1_D_N
differential pair PCIE_RX: +PCIE_RX_P -PCIE_RX_N
differential pair PCIE_CLK: +PCIE_CLK_P -PCIE_CLK_N
differential pair ETH_TRX3: +ETH_TRX3_P -ETH_TRX3_N
differential pair ETH_TRX2: +ETH_TRX2_P -ETH_TRX2_N
differential pair ETH_TRX1: +ETH_TRX1_P -ETH_TRX1_N
differential pair ETH_TRX0: +ETH_TRX0_P -ETH_TRX0_N
differential pair DSI1_D3: +DSI1_D3_P -DSI1_D3_N
differential pair DSI1_D2: +DSI1_D2_P -DSI1_D2_N
differential pair DSI1_D1: +DSI1_D1_P -DSI1_D1_N
differential pair DSI1_D0: +DSI1_D0_P -DSI1_D0_N
differential pair DSI1_CLK: +DSI1_CLK_P -DSI1_CLK_N
differential pair DRAM_B_DQS1: +DRAM_B_DQS1_P -DRAM_B_DQS1_N
differential pair DRAM_B_DQS0: +DRAM_B_DQS0_P -DRAM_B_DQS0_N
differential pair DRAM_B_CLK: +DRAM_B_CLK_P -DRAM_B_CLK_N
differential pair DRAM_A_DQS1: +DRAM_A_DQS1_P -DRAM_A_DQS1_N
differential pair DRAM_A_DQS0: +DRAM_A_DQS0_P -DRAM_A_DQS0_N
differential pair DRAM_A_CLK: +DRAM_A_CLK_P -DRAM_A_CLK_N

## Components (designator, comment, footprint, x,y, rotation, side; value= is the part's Value field where it differs from the comment)
ANT1 "ACAR0301-SW2" ANTENNA_ACAR0301-SW2 1.012,23.904 r90 top locked
C1 "22µF 10V" CAPC1608X10L 12.062,36.254 r180 top
C2 "22µF 10V" CAPC1608X10L 12.062,37.454 r180 top
C3 "22µF 10V" CAPC1608X10L 23.062,33.854 r0 top
C4 "22µF 10V" CAPC1608X10L 23.062,35.054 r0 top
C5 "10µF 25V" CAPC1608X10L 14.912,33.904 r0 bottom
C6 "10µF 25V" CAPC1608X10L 20.212,29.204 r180 bottom
C7 "10µF 25V" CAPC1608X10L 20.212,30.404 r180 bottom
C8 "22µF 10V" CAPC1608X10L 15.062,37.254 r90 top
C9 "22µF 10V" CAPC1608X10L 13.862,37.254 r90 top
C10 "22µF 10V" CAPC1608X10L 23.062,25.504 r0 top
C11 "22µF 10V" CAPC1608X10L 23.062,26.704 r0 top
C12 "10µF 25V" CAPC1608X10L 19.562,33.354 r270 bottom
C13 "10µF 25V" CAPC1608X10L 18.362,33.354 r270 bottom
C14 "10µF 25V" CAPC1608X10L 14.912,30.304 r0 bottom
C15 "22µF 10V" CAPC1608X10L 22.062,37.254 r90 top
C16 "22µF 10V" CAPC1608X10L 23.262,37.254 r90 top
C17 "22µF 10V" CAPC1608X10L 12.062,28.454 r180 top
C18 "22µF 10V" CAPC1608X10L 12.062,27.254 r180 top
C19 "10µF 25V" CAPC1608X10L 14.912,29.104 r0 bottom
C20 "10µF 25V" CAPC1608X10L 14.912,32.704 r0 bottom
C21 "10µF 25V" CAPC1608X10L 14.912,31.504 r0 bottom
C22 "10µF 10V" CAPC1005X06L 15.712,26.254 r270 top
C23 "10µF 10V" CAPC1005X06L 14.912,26.254 r270 top
C24 "1uF 6.3V" CAPC0603X03L 16.462,26.454 r270 top
C25 "10µF 25V" CAPC1608X10L 20.762,33.354 r270 bottom
C26 "10µF 25V" CAPC1608X10L 17.162,33.354 r270 bottom
C27 "100nF 10V" CAPC0603X03L 18.8,25.35 r0 top
C28 "10µF 25V" CAPC1608X10L 20.212,31.604 r180 bottom
C29 "10µF 10V" CAPC1005X06L 12.362,30.154 r180 bottom
C30 "100nF 10V" CAPC0603X03L 22.691,15.579 r90 bottom
C31 "10µF 10V" CAPC1005X06L 14.112,26.254 r270 top
C32 "10µF 10V" CAPC1005X06L 12.362,29.354 r180 bottom
C33 "10µF 10V" CAPC1005X06L 21.762,32.954 r90 bottom
C34 "1uF 6.3V" CAPC0603X03L 29.062,20.754 r180 bottom
C35 "1uF 6.3V" CAPC0603X03L 29.062,20.154 r180 bottom
C36 "1uF 6.3V" CAPC0603X03L 32.562,23.754 r90 bottom
C37 "1uF 6.3V" CAPC0603X03L 29.062,21.354 r180 bottom
C38 "1uF 6.3V" CAPC0603X03L 31.962,23.754 r90 bottom
C39 "10µF 6.3V" CAPC1005X06L 34.062,17.854 r90 bottom
C40 "10µF 6.3V" CAPC1005X06L 32.212,21.154 r270 bottom
C41 "1uF 6.3V" CAPC0603X03L 31.312,22.204 r270 bottom
C42 "1uF 6.3V" CAPC0603X03L 31.962,22.654 r270 bottom
C43 "1uF 6.3V" CAPC0603X03L 31.312,23.304 r90 bottom
C44 "1uF 6.3V" CAPC0603X03L 31.312,21.104 r270 bottom
C45 "1uF 6.3V" CAPC0603X03L 33.812,23.654 r90 bottom
C46 "1uF 6.3V" CAPC0603X03L 33.212,23.654 r90 bottom
C47 "1uF 6.3V" CAPC0603X03L 34.412,23.654 r90 bottom
C48 "10µF 6.3V" CAPC1005X06L 33.762,22.604 r0 bottom
C49 "10µF 6.3V" CAPC1005X06L 33.012,21.154 r270 bottom
C50 "1uF 6.3V" CAPC0603X03L 33.962,21.304 r0 bottom
C51 "1uF 6.3V" CAPC0603X03L 32.562,22.654 r270 bottom
C52 "1uF 6.3V" CAPC0603X03L 33.962,21.904 r0 bottom
C53 "1uF 6.3V" CAPC0603X03L 33.962,20.704 r0 bottom
C54 "1uF 6.3V" CAPC0603X03L 35.604,23.297 r90 bottom
C55 "1uF 6.3V" CAPC0603X03L 35.004,23.297 r90 bottom
C56 "1uF 6.3V" CAPC0603X03L 27.012,20.954 r180 bottom
C57 "10µF 6.3V" CAPC1005X06L 33.262,17.854 r90 bottom
C58 "1uF 6.3V" CAPC0603X03L 28.512,21.954 r0 bottom
C59 "10µF 6.3V" CAPC1005X06L 27.212,21.654 r180 bottom
C60 "10µF 6.3V" CAPC1005X06L 32.212,19.654 r90 bottom
C61 "1uF 6.3V" CAPC0603X03L 30.462,22.454 r0 bottom
C62 "1uF 6.3V" CAPC0603X03L 30.462,21.854 r0 bottom
C63 "1uF 6.3V" CAPC0603X03L 35.062,21.254 r180 bottom
C64 "10µF 6.3V" CAPC1005X06L 34.112,19.654 r90 bottom
C65 "1uF 6.3V" CAPC0603X03L 35.062,20.654 r180 bottom
C66 "1uF 6.3V" CAPC0603X03L 30.462,20.054 r0 bottom
C67 "1uF 6.3V" CAPC0603X03L 30.462,19.454 r0 bottom
C68 "1uF 6.3V" CAPC0603X03L 32.262,17.854 r90 bottom
C69 "10µF 6.3V" CAPC1005X06L 30.707,13.804 r0 bottom
C70 "1uF 6.3V" CAPC0603X03L 37.312,20.954 r90 bottom
C71 "1uF 6.3V" CAPC0603X03L 27.262,18.754 r270 bottom
C72 "1uF 6.3V" CAPC0603X03L 28.212,19.704 r270 bottom
C73 "10µF 6.3V" CAPC1005X06L 33.312,19.659 r90 bottom
C74 "1uF 6.3V" CAPC0603X03L 30.462,21.254 r0 bottom
C75 "1uF 6.3V" CAPC0603X03L 30.462,20.654 r0 bottom
C76 "1uF 6.3V" CAPC0603X03L 35.062,19.454 r180 bottom
C77 "1uF 6.3V" CAPC0603X03L 37.312,19.854 r270 bottom
C78 "1uF 6.3V" CAPC0603X03L 29.062,19.554 r180 bottom
C79 "1uF 6.3V" CAPC0603X03L 29.062,18.354 r180 bottom
C80 "1uF 6.3V" CAPC0603X03L 29.062,18.954 r180 bottom
C81 "10µF 6.3V" CAPC1005X06L 29.512,17.304 r270 bottom
C82 "10µF 6.3V" CAPC1005X06L 31.412,19.654 r90 bottom
C83 "1uF 6.3V" CAPC0603X03L 35.062,20.054 r180 bottom
C84 "1uF 6.3V" CAPC0603X03L 35.062,18.254 r180 bottom
C85 "1uF 6.3V" CAPC0603X03L 35.062,18.854 r180 bottom
C86 "1uF 6.3V" CAPC0603X03L 30.712,23.304 r90 bottom
C87 "1uF 6.3V" CAPC0603X03L 30.112,23.304 r90 bottom
C88 "1uF 6.3V" CAPC0603X03L 30.812,17.454 r270 bottom
C89 "1uF 6.3V" CAPC0603X03L 30.212,17.404 r270 bottom
C90 "10µF 6.3V" CAPC1005X06L 29.412,23.504 r90 bottom
C91 "10µF 6.3V" CAPC1005X06L 36.662,23.254 r0 bottom
C92 "1uF 6.3V" CAPC0603X03L 36.462,18.354 r0 bottom
C93 "1uF 6.3V" CAPC0603X03L 36.462,22.554 r0 bottom
C94 "1uF 6.3V" CAPC0603X03L 36.462,19.554 r0 bottom
C95 "1uF 6.3V" CAPC0603X03L 36.462,21.354 r0 bottom
C96 "1uF 6.3V" CAPC0603X03L 30.462,18.854 r0 bottom
C97 "1uF 6.3V" CAPC0603X03L 35.062,21.854 r180 bottom
C98 "1uF 6.3V" CAPC0603X03L 30.462,18.254 r0 bottom
C99 "1uF 6.3V" CAPC0603X03L 35.062,22.454 r180 bottom
C100 "10µF 6.3V" CAPC1005X06L 36.662,17.654 r0 bottom
C101 "1uF 6.3V" CAPC0603X03L 36.462,20.154 r0 bottom
C102 "1uF 6.3V" CAPC0603X03L 36.462,20.754 r0 bottom
C103 "1uF 6.3V" CAPC0603X03L 36.462,21.954 r0 bottom
C104 "1uF 6.3V" CAPC0603X03L 36.462,18.954 r0 bottom
C105 "100nF 10V" CAPC0603X03L 39.85,37.25 r180 bottom
C106 "100nF 10V" CAPC0603X03L 11.85,10.35 r0 bottom
C107 "1uF 6.3V" CAPC0603X03L 28.062,30.304 r90 top
C108 "1uF 6.3V" CAPC0603X03L 28.062,31.404 r270 top
C109 "15pF 25V" CAPC0603X03L 27.012,20.354 r180 bottom
C110 "100nF 10V" CAPC0603X03L 33.162,11.804 r270 bottom
C111 "100nF 10V" CAPC0603X03L 32.562,11.804 r270 bottom
C112 "100nF 10V" CAPC0603X03L 35.012,9.854 r270 bottom
C113 "100nF 10V" CAPC0603X03L 34.412,9.854 r270 bottom
C114 "10nF 25V" CAPC0603X03L 31.762,16.604 r90 bottom
C115 "10µF 10V" CAPC1005X06L 50.562,23.354 r0 bottom
C116 "10µF 10V" CAPC1005X06L 50.562,17.454 r0 bottom
C117 "1uF 6.3V" CAPC0603X03L 52.562,17.154 r90 bottom
C118 "1uF 6.3V" CAPC0603X03L 43.762,23.654 r270 bottom
C119 "1uF 6.3V" CAPC0603X03L 52.562,23.654 r270 bottom
C120 "1uF 6.3V" CAPC0603X03L 43.762,17.154 r90 bottom
C121 "10µF 10V" CAPC1005X06L 49.362,14.554 r90 bottom
C122 "10µF 10V" CAPC1005X06L 46.962,14.554 r90 bottom
C123 "1uF 6.3V" CAPC0603X03L 52.562,24.954 r270 bottom
C124 "1uF 6.3V" CAPC0603X03L 43.762,25.554 r90 bottom
C125 "1uF 6.3V" CAPC0603X03L 46.962,23.004 r90 bottom
C126 "1uF 6.3V" CAPC0603X03L 52.562,21.654 r90 bottom
C127 "1uF 6.3V" CAPC0603X03L 49.362,23.004 r90 bottom
C128 "1uF 6.3V" CAPC0603X03L 43.762,21.704 r90 bottom
C129 "10µF 10V" CAPC1005X06L 46.962,25.604 r90 bottom
C130 "10µF 10V" CAPC1005X06L 49.362,25.604 r90 bottom
C131 "1uF 6.3V" CAPC0603X03L 52.562,19.104 r270 bottom
C132 "1uF 6.3V" CAPC0603X03L 49.362,17.754 r270 bottom
C133 "1uF 6.3V" CAPC0603X03L 43.762,15.204 r270 bottom
C134 "1uF 6.3V" CAPC0603X03L 43.762,19.104 r270 bottom
C135 "1uF 6.3V" CAPC0603X03L 46.962,17.804 r270 bottom
C136 "1uF 6.3V" CAPC0603X03L 52.562,15.854 r90 bottom
C137 "1uF 6.3V" CAPC0603X03L 17.012,17.304 r0 bottom
C138 "1uF 6.3V" CAPC0603X03L 16.162,18.154 r90 bottom
C139 "1uF 6.3V" CAPC0603X03L 18.012,20.004 r180 bottom
C140 "1uF 6.3V" CAPC0603X03L 18.862,19.154 r270 bottom
C141 "1uF 6.3V" CAPC0603X03L 19.762,20.954 r270 bottom
C142 "1uF 6.3V" CAPC0603X03L 13.762,19.604 r270 bottom
C143 "1uF 6.3V" CAPC0603X03L 19.762,19.854 r90 bottom
C144 "1uF 6.3V" CAPC0603X03L 13.762,20.704 r270 bottom
C145 "1uF 6.3V" CAPC0603X03L 15.262,20.954 r90 bottom
C146 "1uF 6.3V" CAPC0603X03L 13.712,9.404 r270 bottom
C147 "1uF 6.3V" CAPC0603X03L 14.312,9.404 r270 bottom
C148 "1uF 6.3V" CAPC0603X03L 31.262,30.504 r270 top
C149 "1uF 6.3V" CAPC0603X03L 45.782,37.054 r0 top
C150 "1uF 6.3V" CAPC0603X03L 41.912,38.604 r90 top
C151 "1uF 6.3V" CAPC0603X03L 45.812,32.854 r0 top
C152 "1uF 6.3V" CAPC0603X03L 40.462,29.404 r270 top
C153 "1uF 6.3V" CAPC0603X03L 44.062,29.404 r270 top
C154 "1uF 6.3V" CAPC0603X03L 36.612,31.254 r180 top
C155 "1uF 6.3V" CAPC0603X03L 36.612,36.754 r180 top
C156 "1uF 6.3V" CAPC0603X03L 36.612,32.754 r180 top
C157 "1uF 6.3V" CAPC0603X03L 36.612,35.254 r180 top
C158 "1uF 6.3V" CAPC0603X03L 38.962,38.604 r90 top
C159 "1uF 6.3V" CAPC0603X03L 44.862,29.404 r270 top
C160 "1uF 6.3V" CAPC0603X03L 47.412,31.554 r180 top
C161 "1uF 6.3V" CAPC0603X03L 42.512,38.604 r90 top
C162 "1uF 6.3V" CAPC0603X03L 45.812,32.254 r0 top
C163 "1uF 6.3V" CAPC0603X03L 45.812,34.654 r0 top
C164 "1uF 6.3V" CAPC0603X03L 43.462,29.404 r270 top
C167 "1uF 6.3V" CAPC0603X03L 1.712,17.354 r180 top
C168 "OPT" CAPC1005X06L 0.362,20.104 r90 top
C169 "OPT" CAPC0603X03L 1.712,17.944 r180 top
C171 "1pF 50V" CAPC1005X06L 1.812,26.554 r180 top
C172 "1.2pF 50V" CAPC1005X06L 0.362,27.204 r90 top
C173 "OPT" CAPC1005X06L 2.862,20.104 r270 top
C174 "OPT" CAPC1005X06L 4.562,20.104 r270 top
C175 "1uF 6.3V" CAPC0603X03L 7.262,13.304 r180 bottom
C176 "100nF 10V" CAPC0603X03L 6.312,7.404 r90 bottom
C177 "100nF 10V" CAPC0603X03L 7.112,10.384 r90 bottom
C178 "10µF 10V" CAPC1005X06L 6.762,8.354 r180 bottom
C179 "10µF 10V" CAPC1005X06L 8.962,10.304 r180 bottom
C180 "1uF 6.3V" CAPC0603X03L 8.512,7.904 r0 top
C181 "10µF 10V" CAPC1005X06L 7.812,9.954 r90 bottom
C182 "1uF 6.3V" CAPC0603X03L 39.112,6.854 r90 bottom
C183 "10µF 10V" CAPC1005X06L 39.057,7.804 r180 bottom
C184 "10µF 10V" CAPC1005X06L 39.062,8.604 r180 bottom
C185 "10µF 10V" CAPC1005X06L 44.012,10.554 r90 bottom
C186 "120pF 50V" CAPC0603X03L 46.012,11.404 r270 top
C187 "10µF 10V" CAPC1005X06L 42.862,10.954 r0 bottom
C188 "10µF 10V" CAPC1005X06L 42.862,10.154 r0 bottom
C189 "470nF 10V" CAPC0603X03L 46.612,10.304 r270 top
C190 "10µF 10V" CAPC1005X06L 41.362,7.304 r180 bottom
C191 "10µF 10V" CAPC1005X06L 40.212,8.154 r90 bottom
C192 "1uF 6.3V" CAPC0603X03L 23.65,7 r180 bottom
C193 "33nF 10V" CAPC0603X03L 33.037,37.754 r90 top
C194 "33nF 10V" CAPC0603X03L 35.212,35.404 r90 top
C195 "1uF 6.3V" CAPC0603X03L 30.303,34.199 r270 top
C196 "470nF 10V" CAPC0603X03L 9.812,3.054 r180 bottom
C197 "1uF 6.3V" CAPC0603X03L 8.962,3.304 r270 bottom
C198 "1uF 6.3V" CAPC0603X03L 37.312,10.855 r90 bottom
D1 "VS3V3BA1EST15R" DFN38P60X29-2L 24.962,37.904 r90 top
D2 "BAS40L-G3-08" DFN1006-2A 31.7,32.95 r0 top
D3 "VS5V0BA1EST15R" DFN38P60X29-2L 12.712,38.604 r180 bottom
D4 "BAS40L-G3-08" DFN1006-2A 34.712,5.804 r90 bottom
D5 "VS5V0BA1EST15R" DFN38P60X29-2L 24.362,5.879 r90 bottom
D6 "VS5V0BA1EST15R" DFN38P60X29-2L 23.512,5.879 r90 bottom
D7 "BAS40L-G3-08" DFN1006-2A 8.402,6.734 r270 bottom
D8 "VS5V0BA1EST15R" DFN38P60X29-2L 12.662,3.514 r90 bottom
D9 "VS5V0BA1EST15R" DFN38P60X29-2L 12.662,4.514 r270 bottom
D10 "BAS40L-G3-08" DFN1006-2A 10.652,6.734 r90 bottom
D11 "BAS40L-G3-08" DFN1006-2A 30.4,32.85 r270 top
J1 "CONMHF1-SMD" "U.FL Jack SMD" 2.479,30.904 r270 top
J2 "CONMHF1-SMD" "U.FL Jack SMD" 3.487,17.844 r270 bottom
J3 "DF40C-100DP-0.4V(51)" "BOARD-TO-BOARD DF40C-100DP-0.4V" 24.902,36.899 r180 bottom locked
J4 "DF40C-100DP-0.4V(51)" "BOARD-TO-BOARD DF40C-100DP-0.4V" 24.902,2.899 r180 bottom locked
J5 "FH35C-33S-0.3SHW" "FFC 33POL 0.3MM FH35C-33S-0.3SHW" 16.912,2.654 r0 top locked
J6 "74AUP1G74GT,115" PSON50P100X50-8L 38.762,10.955 r270 bottom
L1 "0.47µH 3.7A 33mOhm" INDC2016X12L 11.912,34.304 r90 top
L2 "0.47µH 3.7A 33mOhm" INDC2016X12L 22.912,31.904 r90 top
L3 "0.47µH 3.7A 33mOhm" INDC2016X12L 17.012,37.104 r180 top
L4 "0.47µH 3.7A 33mOhm" INDC2016X12L 22.912,28.654 r270 top
L5 "0.47µH 3.7A 33mOhm" INDC2016X12L 20.117,37.104 r0 top
L6 "0.47µH 3.7A 33mOhm" INDC2016X12L 11.912,30.404 r270 top
L7 "120Ohm 900mA" INDC0603X03L 36.612,37.354 r180 top
L8 "120Ohm 900mA" INDC0603X03L 45.762,31.554 r0 top
L9 "2.2µH 950mA 180mOhm" INDC2012X10L 9.562,9.104 r180 bottom
L10 "0.47µH 3.7A 33mOhm" INDC2016X12L 42.162,10.404 r180 top
L11 "330Ohm 305mA" INDC0603X03L 35.212,34.304 r90 top
L12 "330Ohm 305mA" INDC0603X03L 32.662,38.604 r0 top
L13 "330Ohm 305mA" INDC0603X03L 32.437,37.754 r270 top
L14 "1.0nH, 600mA" INDC0603X03L 1.982,18.8 r90 top
L15 "1.2nH, 1.1A" INDC0603X03L 1.712,19.604 r180 top
NT1 "Net Tie" Net_Tie_0.2mm#1 30.082,23.184 r0 top net-tie
NT2 "Net Tie" Net_Tie_0.2mm#2 30.862,16.454 r90 top net-tie
Q1 "SSM3K15ACT,L3F" DFN65P100X50-3L 41.012,10.104 r0 bottom
Q2 "SSM3K15ACT,L3F" DFN65P100X50-3L 35.212,38.404 r180 top
Q3 "SSM3K15ACT,L3F" DFN65P100X50-3L 11.262,38.454 r0 bottom
Q4 "SSM3K15ACT,L3F" DFN65P100X50-3L 25.853,33.769 r90 top
Q5 "SSM3K15ACT,L3F" DFN65P100X50-3L 25.853,32.519 r90 top
Q7 "SSM3K15ACT,L3F" DFN65P100X50-3L 9.827,6.609 r270 bottom
R1 "0R 1%" RESC0603X03L 11.412,33.154 r90 bottom
R2 "0R 1%" RESC0603X03L 12.412,35.054 r90 bottom
R3 "1k 1%" RESC0603X03L 19.312,27.754 r0 bottom
R4 "100k 1%" RESC0603X03L 22.162,27.404 r180 bottom
R5 "100k 1%" RESC0603X03L 25.112,33.654 r90 top
R6 "100k 1%" RESC0603X03L 24.162,36.804 r270 top
R7 "4.7k 1%" RESC0603X03L 19.312,27.154 r180 bottom
R8 "22R 1%" RESC0603X03L 27.6,15.9 r180 bottom
R9 "402R 1%" RESC0603X03L 26.2,17 r90 bottom
R10 "10k 1%" RESC0603X03L 39.212,20.904 r0 bottom
R11 "240R 1%" RESC0603X03L 39.762,20.104 r90 bottom
R12 "2.1k 1%" RESC0603X03L 46.086,3.15 r270 bottom
R13 "2.1k 1%" RESC0603X03L 44.818,3.15 r270 bottom
R14 "2.1k 1%" RESC0603X03L 43.517,3.15 r270 bottom
R15 "2.1k 1%" RESC0603X03L 42.262,3.15 r270 bottom
R16 "100k 1%" RESC0603X03L 28.212,18.624 r90 bottom
R17 "100k 1%" RESC0603X03L 25.962,17.854 r0 bottom
R18 "100k 1%" RESC0603X03L 28.45,17.3 r90 bottom
R19 "2.4k 1%" RESC0603X03L 29.262,13.304 r180 bottom
R20 "0R 1%" RESC0603X03L 46.086,4.2 r270 bottom
R21 "0R 1%" RESC0603X03L 44.818,4.2 r270 bottom
R22 "0R 1%" RESC0603X03L 43.517,4.2 r270 bottom
R23 "0R 1%" RESC0603X03L 42.262,4.2 r270 bottom
R24 "100k 1%" RESC0603X03L 27.012,17.854 r0 bottom
R25 "10k 1%" RESC0603X03L 24.65,25.95 r0 bottom
R26 "100k 1%" RESC0603X03L 46.086,6.15 r270 bottom
R27 "100k 1%" RESC0603X03L 44.818,6.15 r270 bottom
R28 "100k 1%" RESC0603X03L 43.517,6.15 r270 bottom